# Altium PCB linkit-v4-0.1_6layers.PcbDoc (part 1 of 4)
Units mm, origin at the board's own origin, x right, y up, seen from the top; angles counter-clockwise.
Board outline 70 x 35 mm, 6 copper layers (Top Layer, Int1 (GND), Int2 (Sign), Int3 (Sign), Int4 (PWR), Bottom Layer), stack 1.551 mm thick; 190 components, 157 nets, 771 pads, 177 vias.
Unrouted connection lines stored in the file: 245.
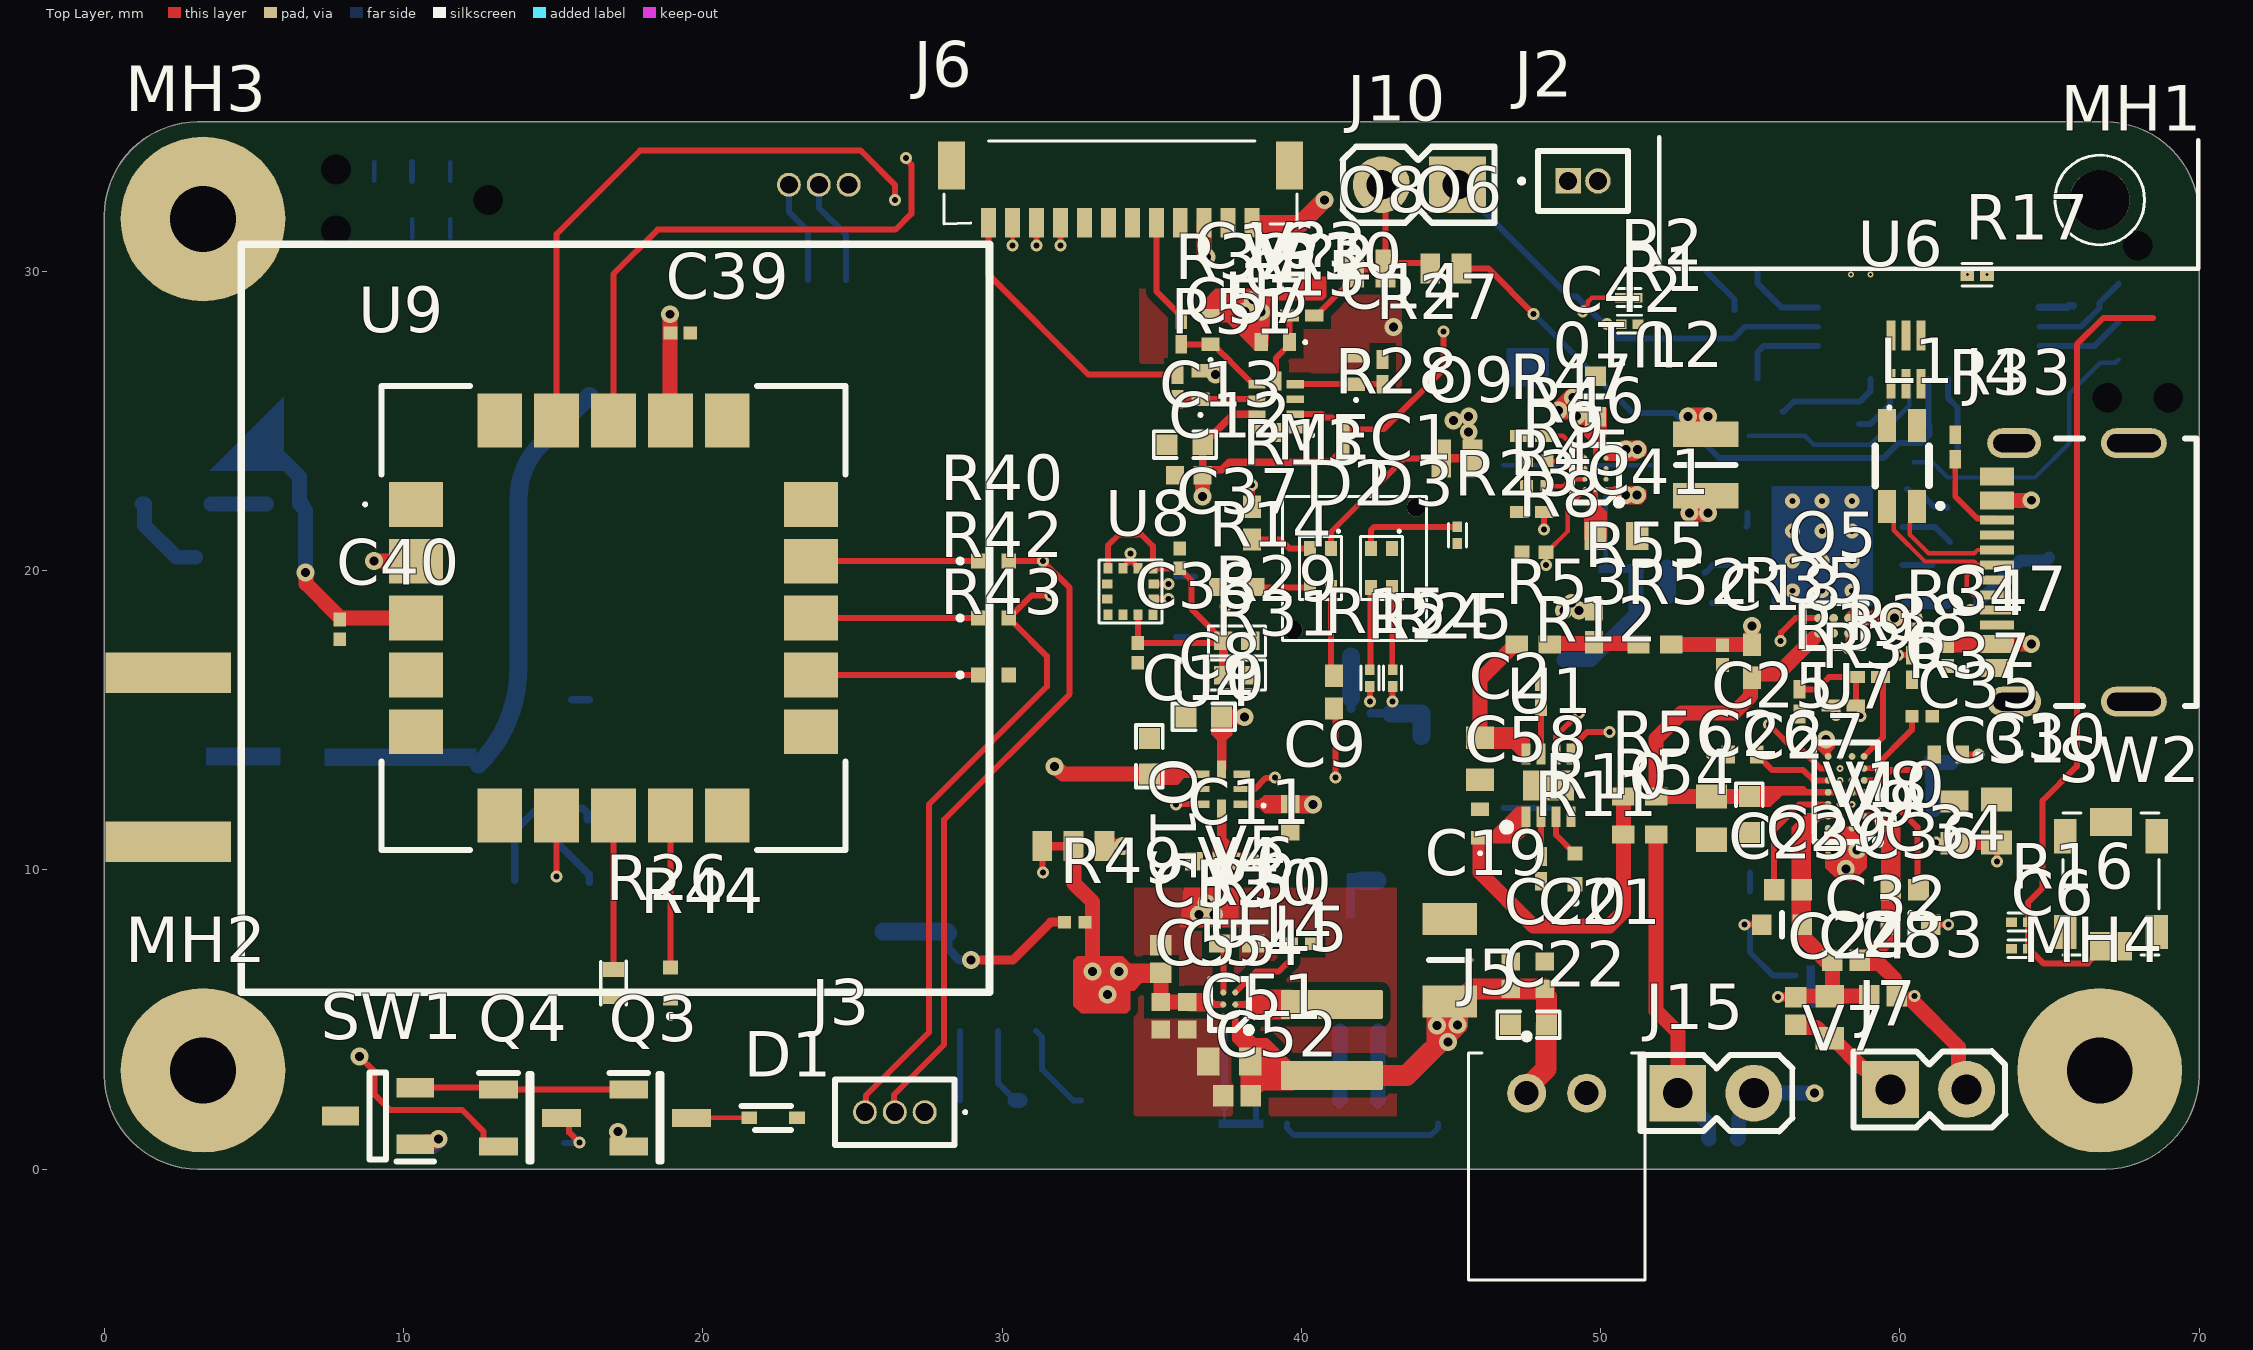
[diagram p0: Top Layer view]
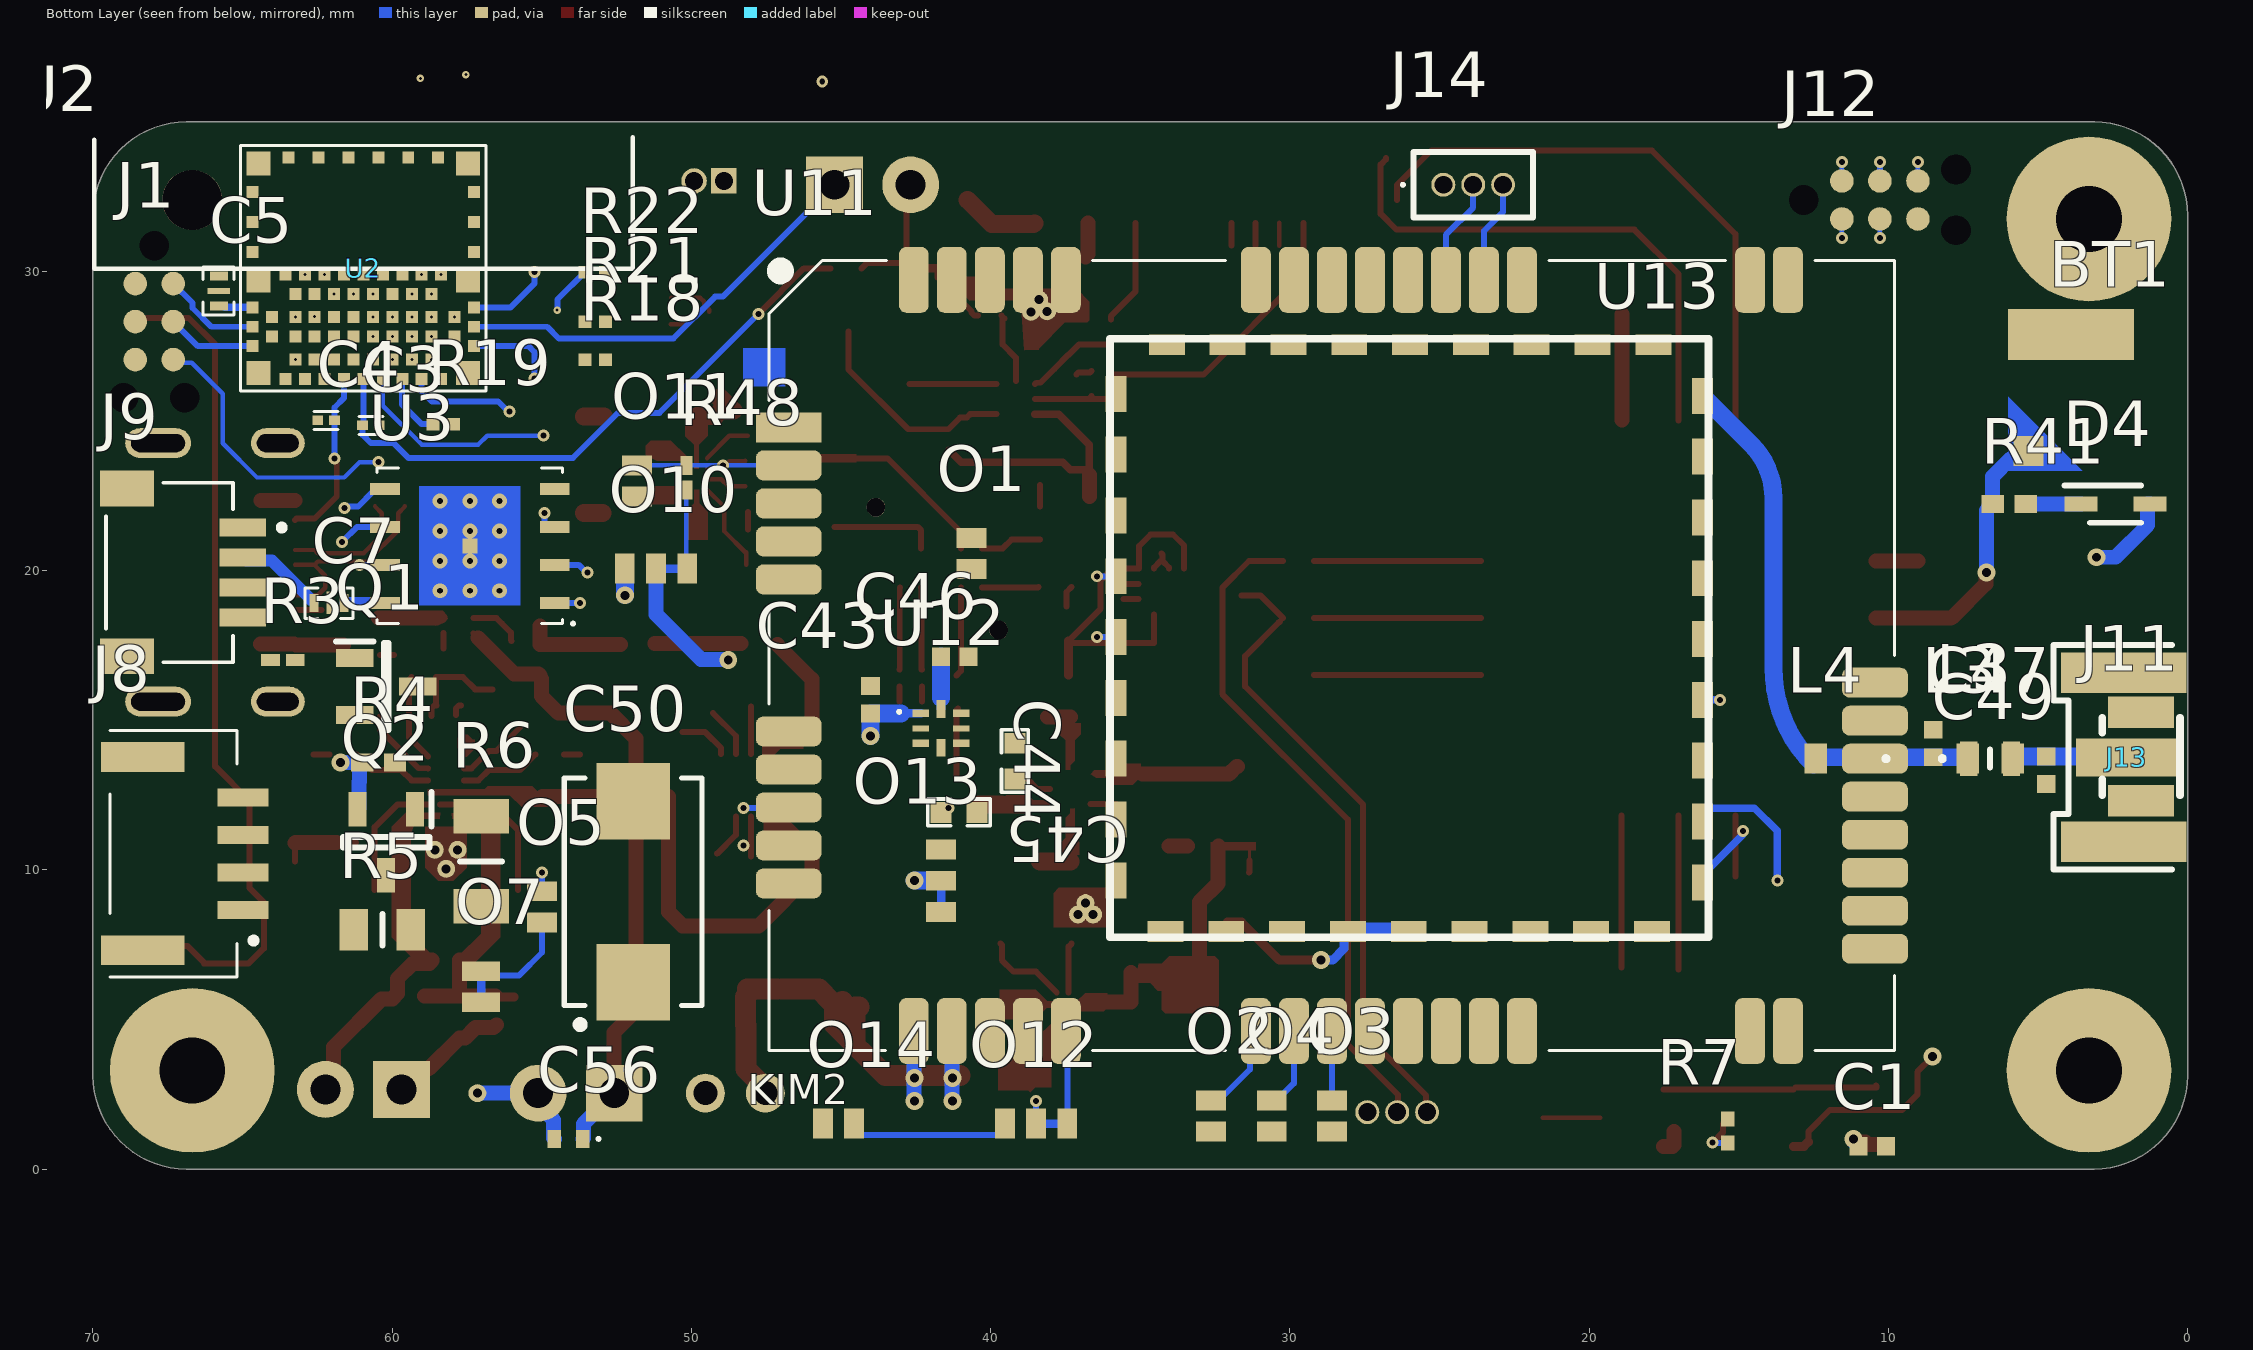
[diagram p1: Bottom Layer view, seen from below]
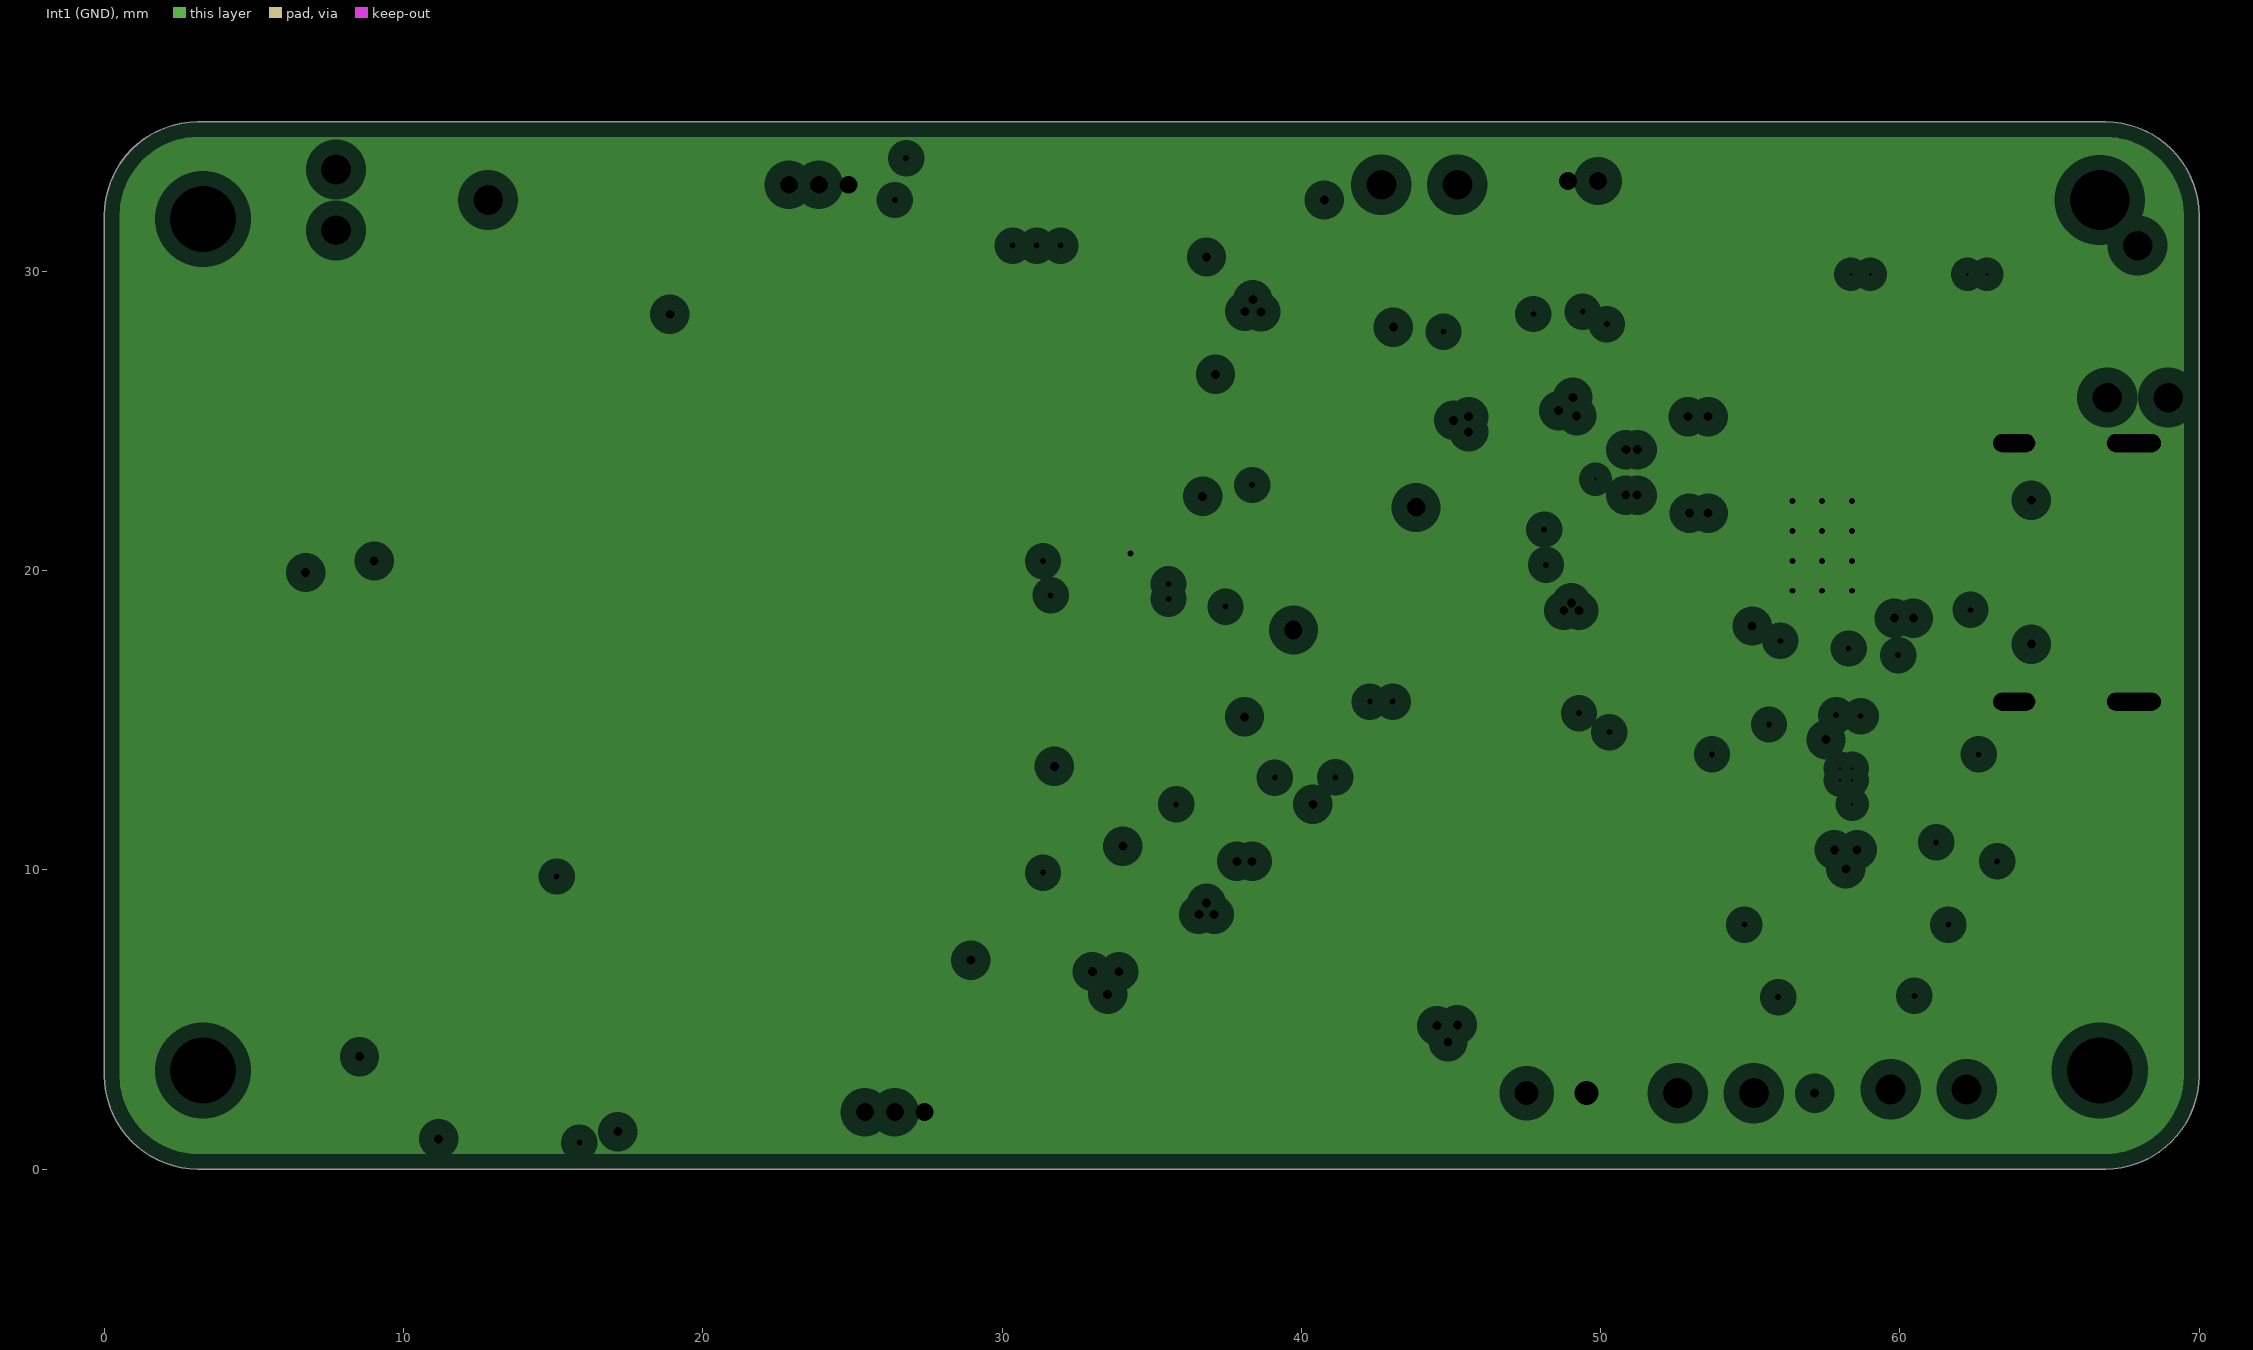
[diagram p2: Int1 (GND), clearances drawn from the general rule]
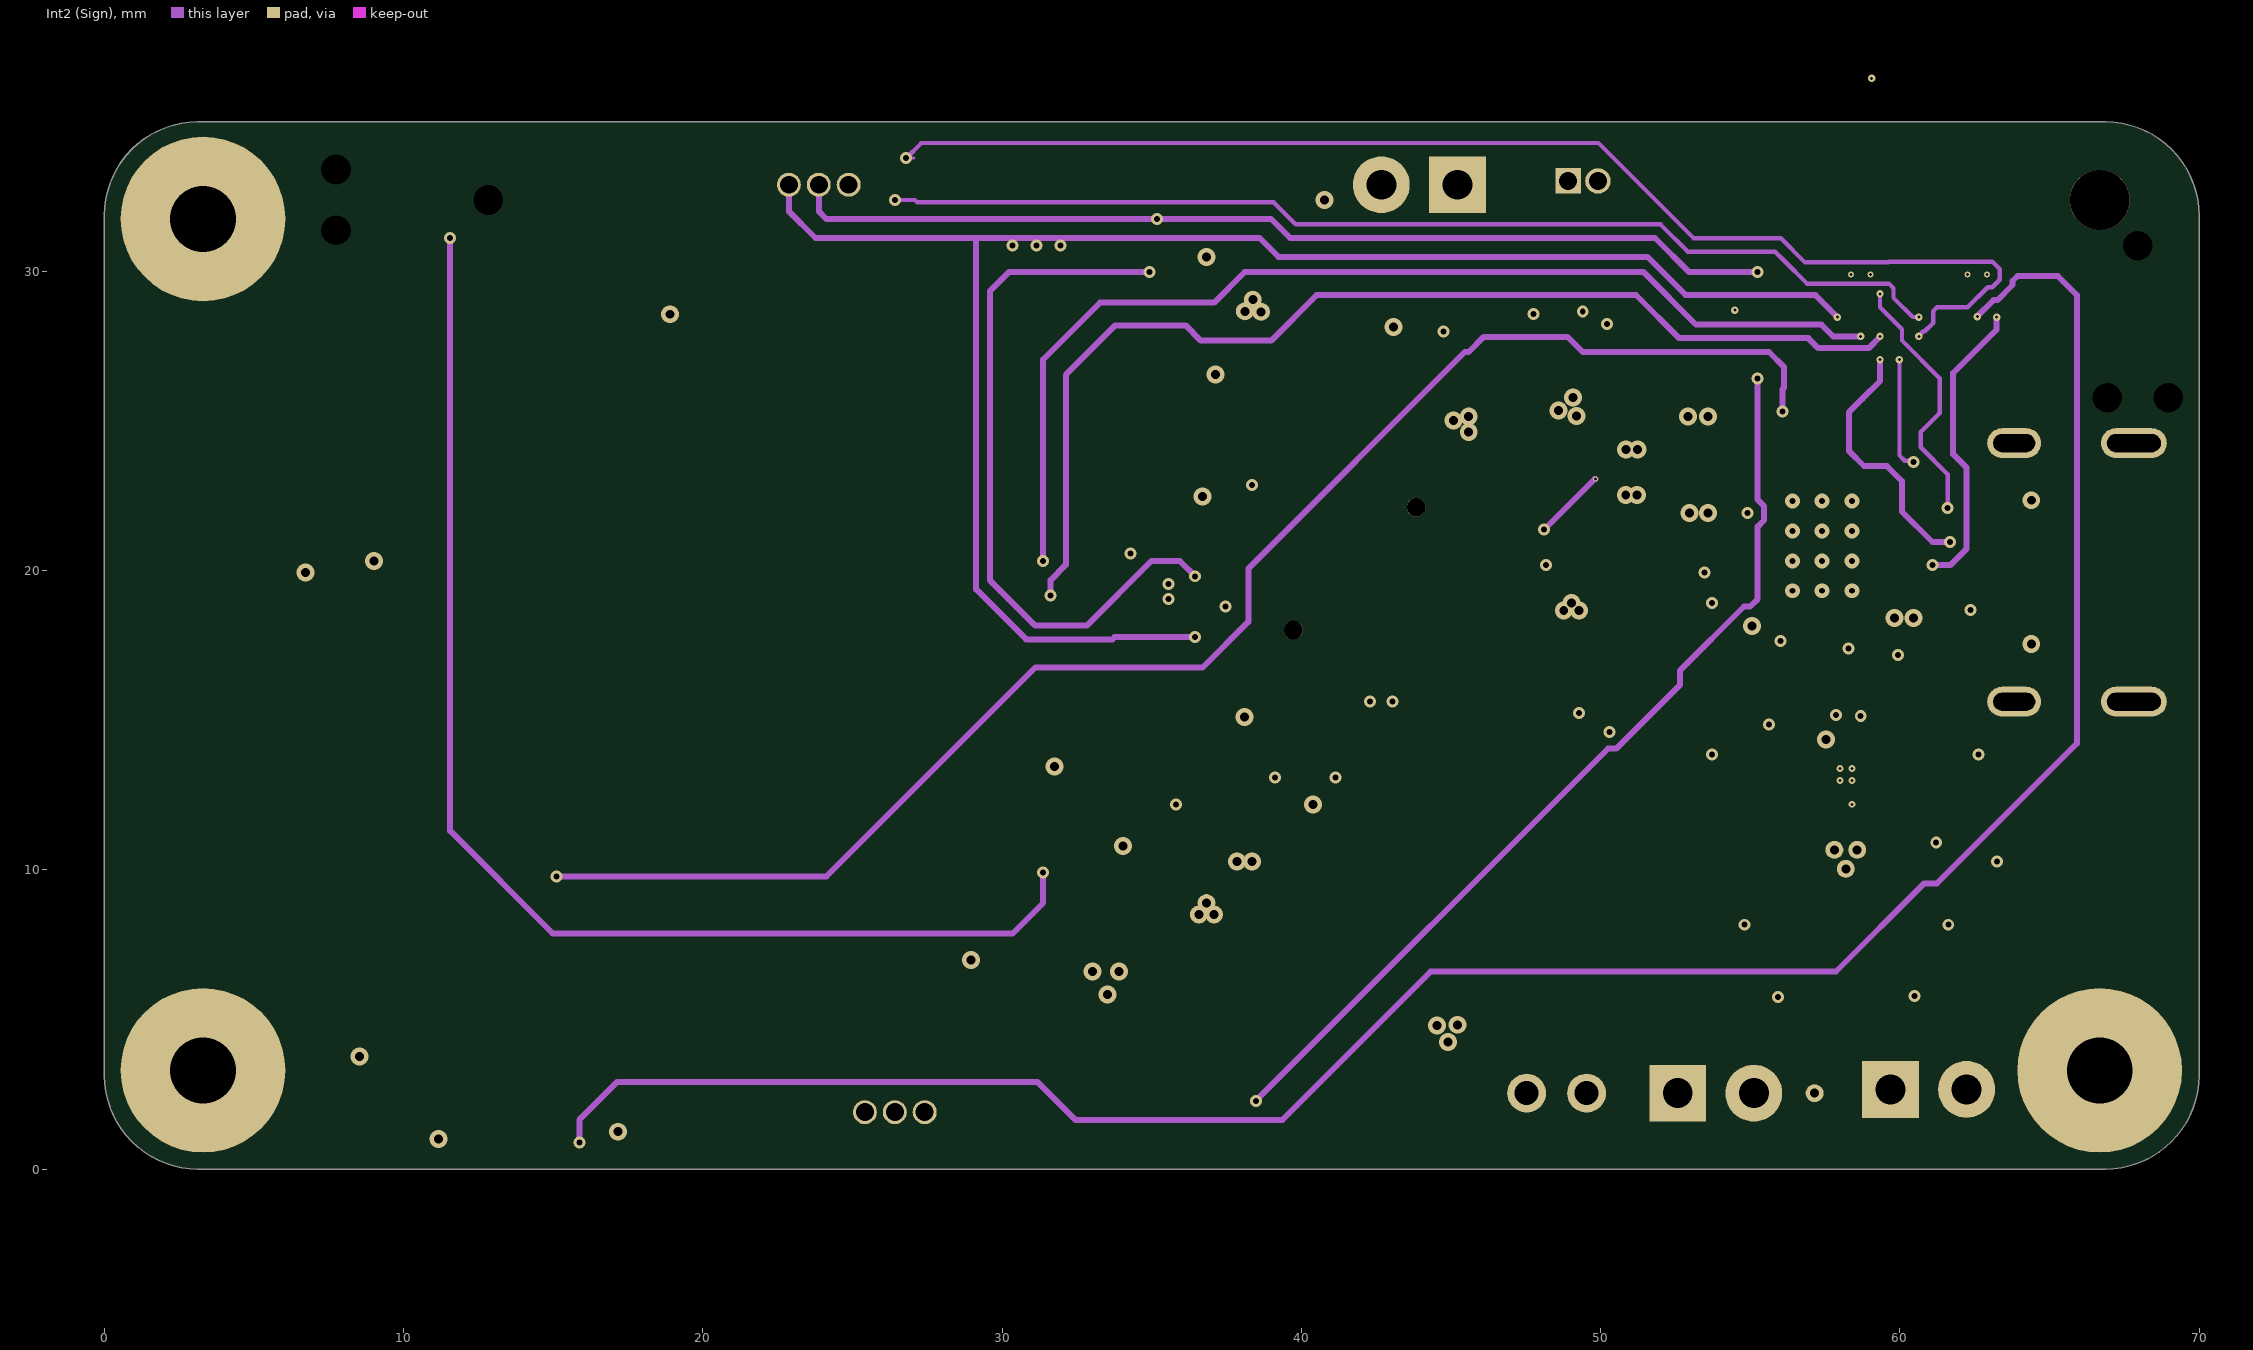
[diagram p3: Int2 (Sign)]
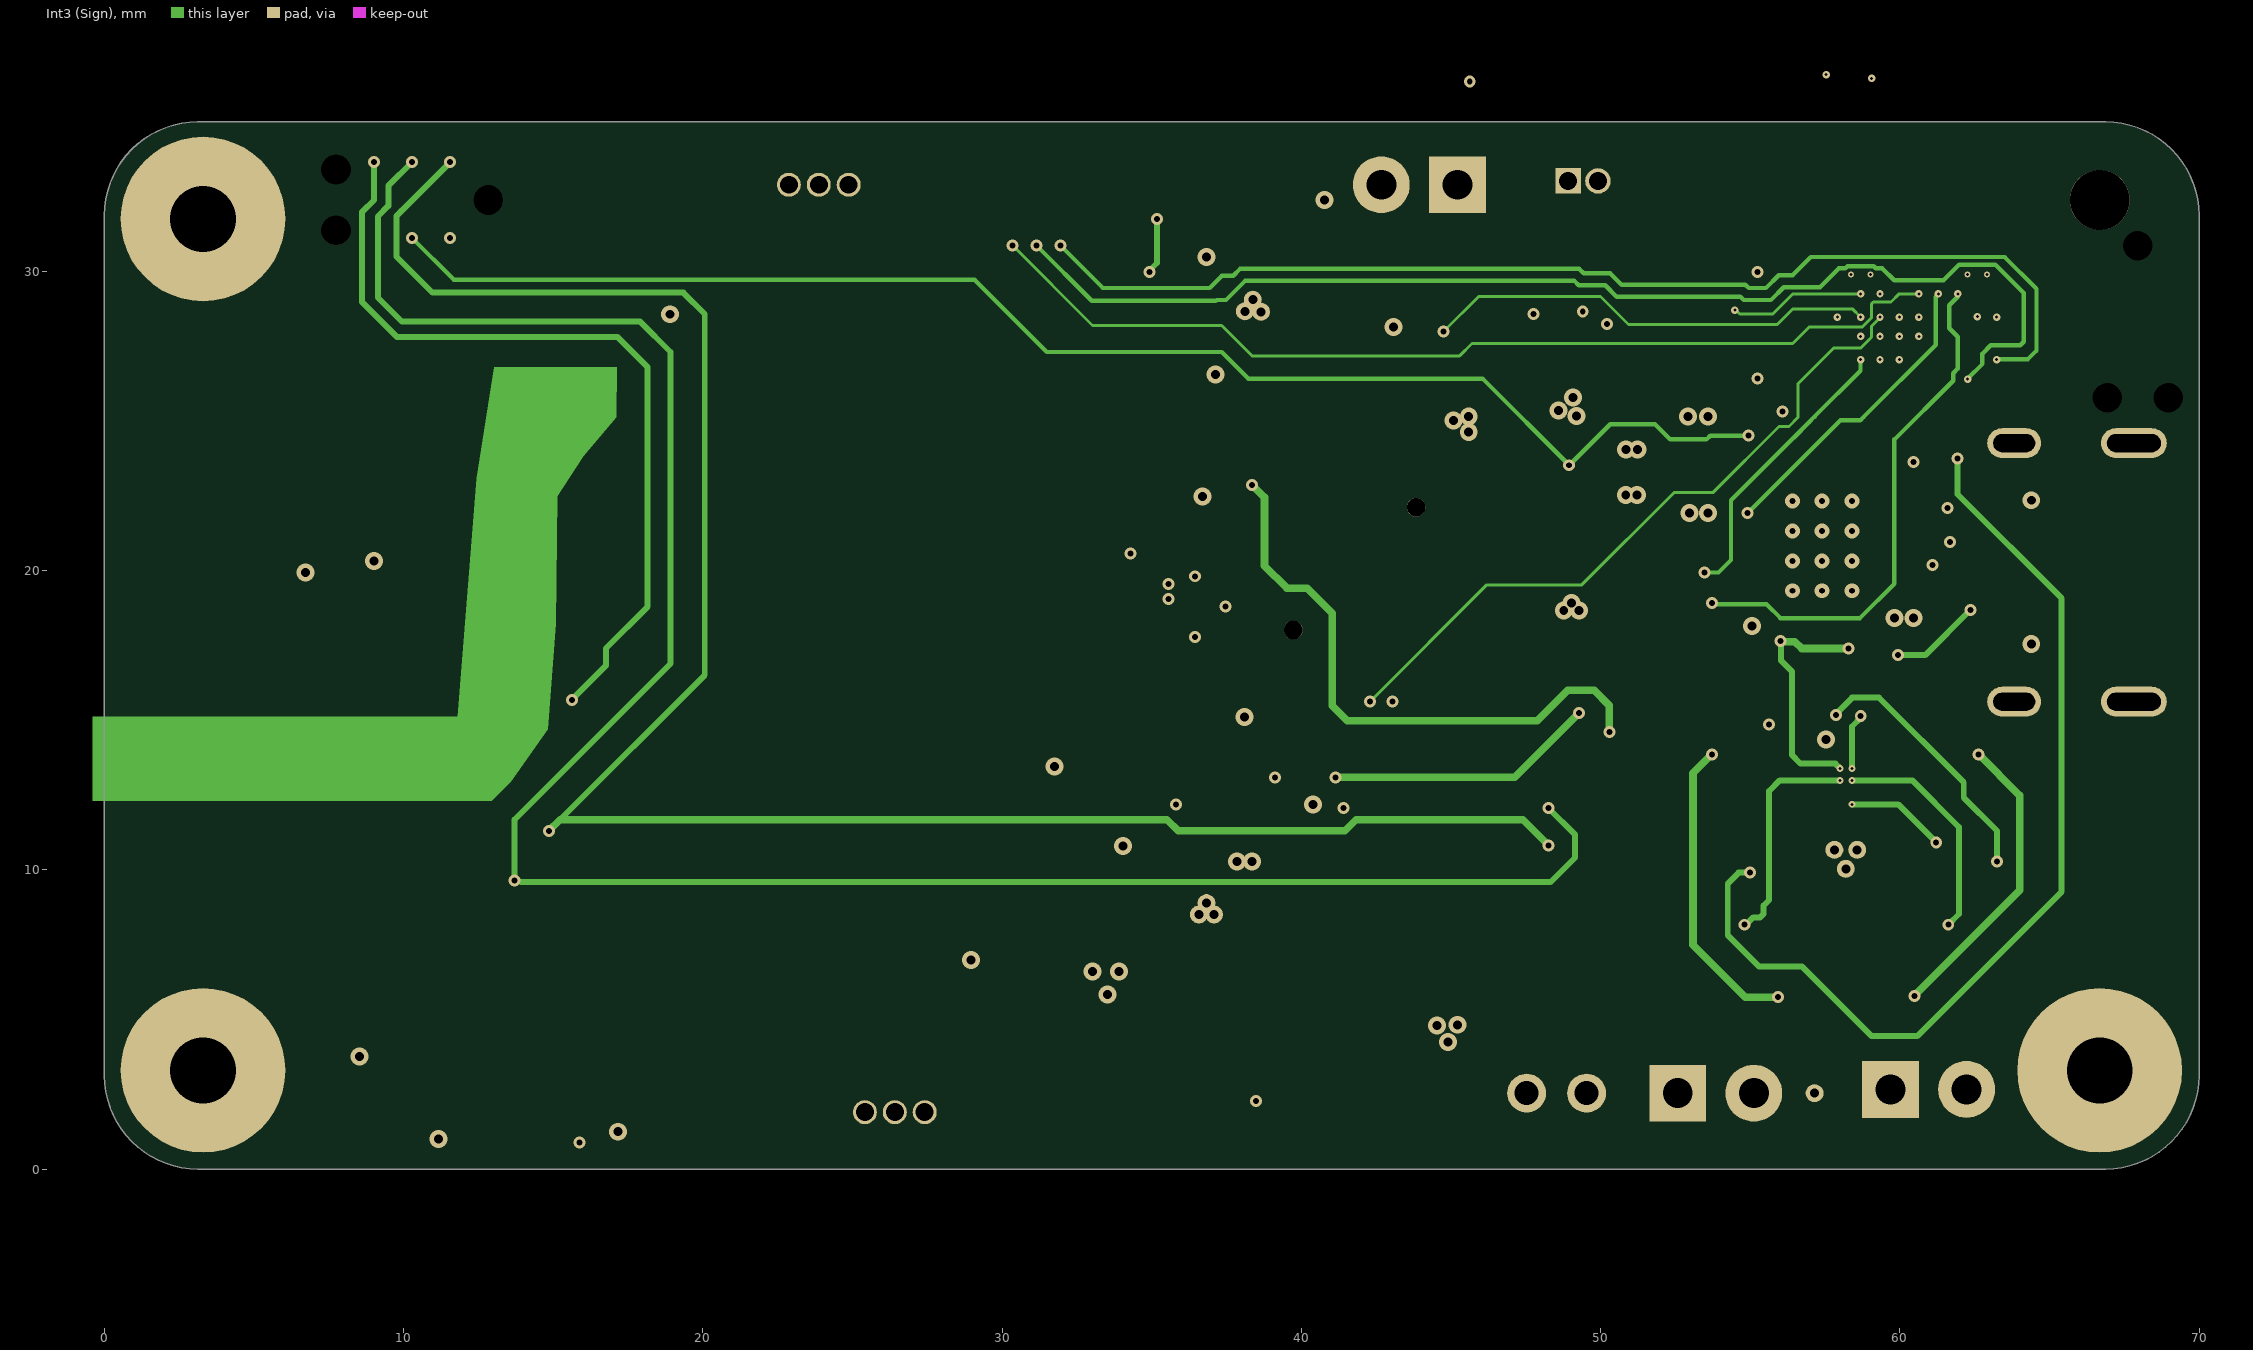
[diagram p4: Int3 (Sign)]
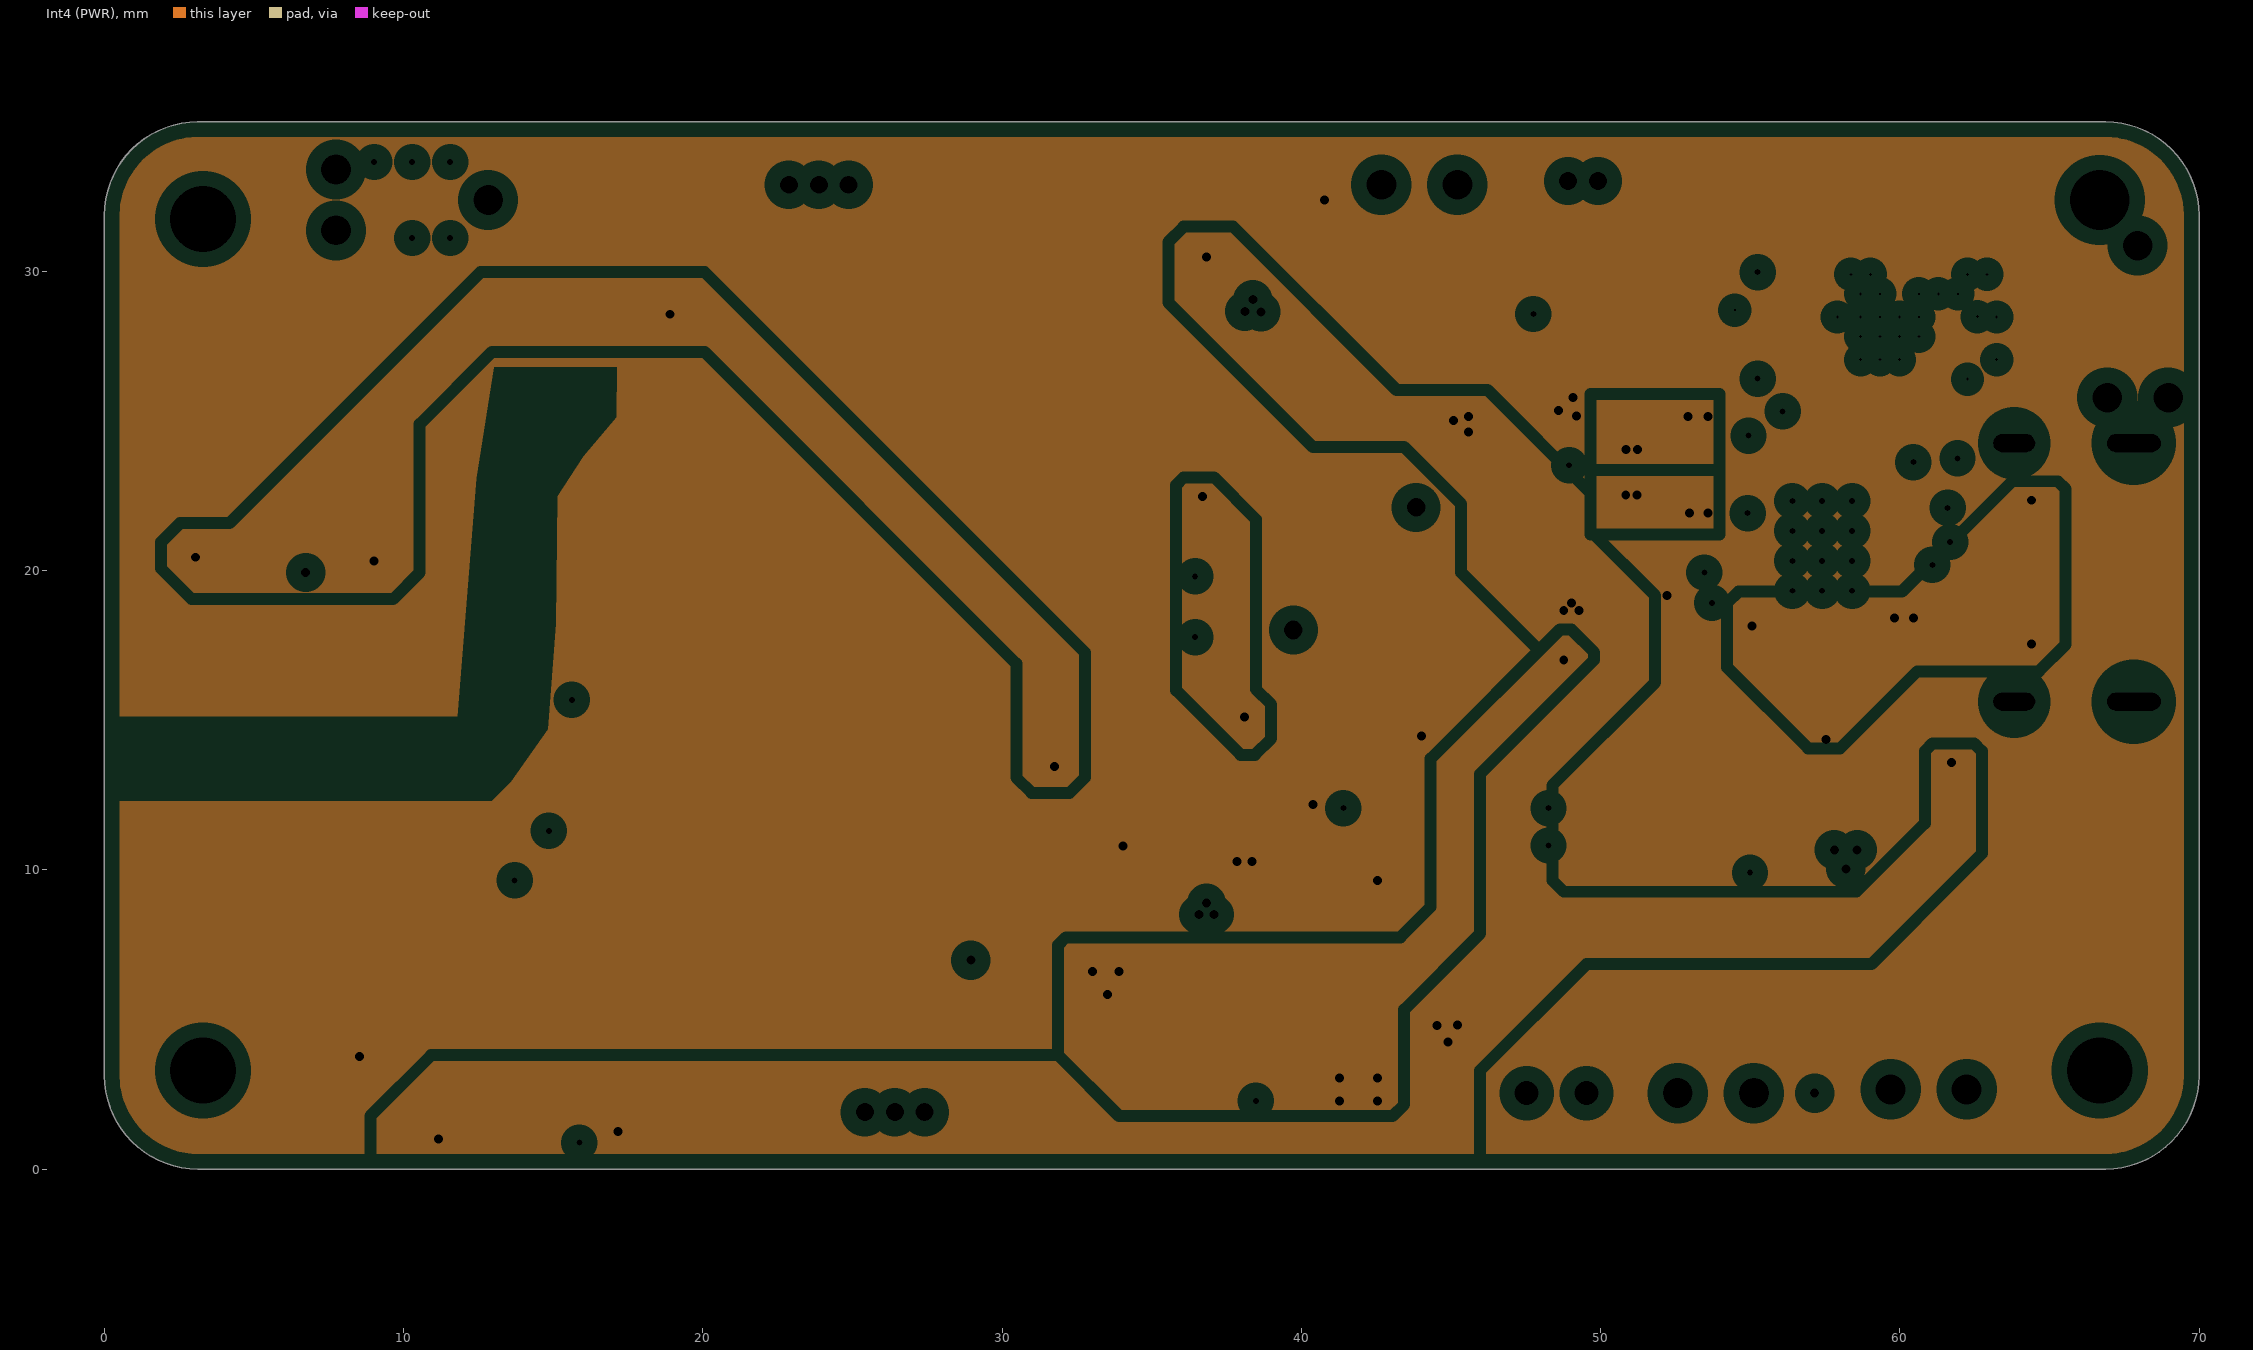
[diagram p5: Int4 (PWR), clearances drawn from the general rule]

## Layer stack, top to bottom
Top Solder: solder mask 0.0254, SM-001, Dk 4
Top Layer: signal copper 0.035
Dielectric 1: prepreg 0.0711, PP-006, Dk 4.1
Dielectric 2: prepreg 0.0711, PP-006, Dk 4.1
Int1 (GND): plane copper 0.035, net GND
Dielectric 3: core 0.4572, Core-035, Dk 4.7
Int2 (Sign): signal copper 0.035
Dielectric 4: prepreg 0.0711, PP-006, Dk 4.1
Dielectric 5: prepreg 0.0711, PP-006, Dk 4.1
Int3 (Sign): signal copper 0.035
Dielectric 6: core 0.4572, Core-035, Dk 4.7
Int4 (PWR): plane copper 0.035, net (Multiple Nets)
Dielectric 7: prepreg 0.0711, PP-006, Dk 4.1
Dielectric 8: prepreg 0.0711, PP-006, Dk 4.1
Bottom Layer: signal copper 0.035
Bottom Solder: solder mask 0.0254, SM-001, Dk 4

## Board outline
0,3.126 0,3.301 0,3.302 0,31.875 cw(c3.15,31.85) 3.125,35.001 3.125,35 66.875,35 66.875,35.001 cw(c66.85,31.85) 70,31.875 70,3.125 cw(c66.85,3.15) 66.875,0 3.125,0 cw(c3.15,3.151)

## Design rules (kind name [scope] priority, off if disabled: settings)
Clearance BGA_clearance [WithinRoom('ISP1807')] p1: gap=0.1 ignorepadtopadclearanceinfootprint=FALSE
Clearance GND_PGND2_Clearance [InNet('PGND2') vs InNet('PGND2')] p2: gap=0 ignorepadtopadclearanceinfootprint=FALSE
Clearance GND_PGND1_Clearance [InNet('PGND1') vs InNet('PGND1')] p3: gap=0 ignorepadtopadclearanceinfootprint=FALSE
Clearance [All] p4: gap=0.254 ignorepadtopadclearanceinfootprint=FALSE
ComponentClearance ComponentClearance_1 [InNet('GND') vs InNet('PGND1')] p1: gap=0 collisioncheckmode=3 verticalgap=0.254 showdistances=FALSE
ComponentClearance [All] p2: gap=0.254 collisioncheckmode=3 verticalgap=0.254 showdistances=FALSE
DiffPairsRouting [All] p1: maxlimit=0.127 minlimit=0.127 mostfreqgap=0.127 toplayer_minwidth=0.146 toplayer_maxwidth=0.146 toplayer_prefwidth=0.146 midlayer1_minwidth=0.08 midlayer1_maxwidth=0.08 midlayer1_prefwidth=0.08 midlayer2_minwidth=0.08 midlayer2_maxwidth=0.08 midlayer2_prefwidth=0.08 bottomlayer_minwidth=0.146 bottomlayer_maxwidth=0.146 bottomlayer_prefwidth=0.146 impedanceprofiledriven=TRUE impedanceprofileid={9859EE02-7A4D-4AE4-9C0F-A4F87AE66AFC} impedanceprofilevalue=90.000000 maxuncoupledlength=12.7
HoleSize [All] p1: absolutevalues=TRUE maxlimit=2.54 minlimit=0.1 maxpercent=80.000 minpercent=20.000
HoleToHoleClearance HoleToHoleClearance_1 [InNet('GND') vs InNet('PGND1')] p1: gap=0 allowstackedmicrovias=TRUE
HoleToHoleClearance [All] p2: gap=0.254 allowstackedmicrovias=TRUE
MaxMinImpedance "Schematic Impedance Constraint" [InNet('SAT_ANTENNA')] p1: minimum=48.00 maximum=52.00
PlaneClearance [All] p1: clearance=0.508
PlaneConnect PlaneConnect_PWR [InNetClass('Power')] p1: pad.planeconnectstyle=Relief pad.reliefexpansion=0.508 pad.reliefentries=4 pad.reliefconductorwidth=0.254 pad.reliefairgap=0.254 via.planeconnectstyle=Direct via.reliefexpansion=0.508 via.reliefentries=4 via.reliefconductorwidth=0.254 via.reliefairgap=0.254
PlaneConnect PlaneConnect_2 [InNet('GND')] p2: planeconnectstyle=Relief reliefexpansion=0.508 reliefentries=4 reliefconductorwidth=0.254 reliefairgap=0.254
PlaneConnect PlaneConnect_1 [InNet('PGND1')] p3: planeconnectstyle=Relief reliefexpansion=0.508 reliefentries=4 reliefconductorwidth=0.254 reliefairgap=0.254
PlaneConnect [All] p4: planeconnectstyle=Direct reliefexpansion=0.508 reliefentries=4 reliefconductorwidth=0.254 reliefairgap=0.254
PolygonConnect PolygonConnect_1 [InNet('GND') vs InNet('PGND2')] p1: connectstyle=Direct reliefconductorwidth=0.254 reliefentries=4 polygonreliefangle="90 Angle" airgapwidth=0.254
PolygonConnect DirectGND_VIas [InNet('GND') vs InNet('PGND1')] p2: connectstyle=Direct reliefconductorwidth=0.254 reliefentries=4 polygonreliefangle="90 Angle" airgapwidth=0.254
PolygonConnect [All] p3: connectstyle=Direct reliefconductorwidth=0.254 reliefentries=4 polygonreliefangle="90 Angle" airgapwidth=0.254
RoomDefinition SMD [InComponentClass('SMD')] p1: confinementstyle=ConfineIn formatcopy=TRUE lockcomponents=FALSE outline 2.465,1.405 42.47,1.405 42.47,36.076 2.465,36.076
RoomDefinition ISP1807 [False vs False] p2: confinementstyle=ConfineIn formatcopy=TRUE lockcomponents=FALSE outline 56.134,25.146 69.723,25.146 69.723,35.814 56.134,35.814
RoomDefinition KIM2 [InComponentClass('KIM2')] p3: confinementstyle=ConfineIn formatcopy=TRUE lockcomponents=FALSE outline 0.889,-0.372 47.985,-0.372 47.985,35.569 0.889,35.569
RoomDefinition Sensors [InComponentClass('Sensors')] p4: confinementstyle=ConfineIn formatcopy=TRUE lockcomponents=FALSE outline 123.063,-11.557 173.863,-11.557 173.863,13.843 123.063,13.843
RoomDefinition Power [InComponentClass('Power')] p5: confinementstyle=ConfineIn formatcopy=TRUE lockcomponents=FALSE outline 65.151,106.426 133.096,106.426 133.096,113.03 65.151,113.03
RoutingVias [All] p1: holewidth=0.711 width=1.27 viastyle="Through Hole" minholewidth=0.711 minwidth=1.27 maxholewidth=0.711 maxwidth=1.27
ShortCircuit GND_PGND1 [InNet('GND') vs InNet('PGND1')] p1: allowed=TRUE
ShortCircuit [All] p2: allowed=FALSE
SolderMaskExpansion [All] p1: expansion=0.102 istentingtop=FALSE
SupplyNets "Schematic Supply Nets_13" [InNet('PGND3')] p1: voltage=0.000
SupplyNets "Schematic Supply Nets_12" [InNet('AGND')] p2: voltage=0.000
SupplyNets "Schematic Supply Nets_11" [InNet('PGND1')] p3: voltage=0.000
SupplyNets "Schematic Supply Nets_10" [InNet('VSAT')] p4: voltage=0.000
SupplyNets "Schematic Supply Nets_9" [InNet('GND')] p5: voltage=0.000
SupplyNets "Schematic Supply Nets_8" [InNet('VSENS_2')] p6: voltage=0.000
SupplyNets "Schematic Supply Nets_7" [InNet('VBUS')] p7: voltage=0.000
SupplyNets "Schematic Supply Nets_6" [InNet('PGND2')] p8: voltage=0.000
SupplyNets "Schematic Supply Nets_5" [InNet('DCDC_3V3')] p9: voltage=0.000
SupplyNets "Schematic Supply Nets_4" [InNet('VSYS_SMD')] p10: voltage=0.000
SupplyNets "Schematic Supply Nets_3" [InNet('VSENS_1')] p11: voltage=0.000
SupplyNets "Schematic Supply Nets_2" [InNet('VSYS_VPA')] p12: voltage=0.000
SupplyNets "Schematic Supply Nets_1" [InNet('VSYS')] p13: voltage=0.000
SupplyNets "Schematic Supply Nets" [InNet('VBAT')] p14: voltage=0.000
Width "Schematic Width Constraint_3" [InNet('NetC2_2')] p1: maxlimit=1 minlimit=0.254 preferedwidth=0.5 toplayer_minwidth=0.4 midlayer1_maxwidth=0.254 midlayer1_prefwidth=0.254 midlayer2_maxwidth=0.254 midlayer2_prefwidth=0.254 bottomlayer_minwidth=0.4 minimp=50.000000 maximp=50.000000 favimp=50.000000
Width "Schematic Width Constraint_4" [InNet('SPV-')] p2: maxlimit=1 minlimit=0.254 preferedwidth=0.5 toplayer_minwidth=0.4 midlayer1_maxwidth=0.254 midlayer1_prefwidth=0.254 midlayer2_maxwidth=0.254 midlayer2_prefwidth=0.254 bottomlayer_minwidth=0.4 minimp=50.000000 maximp=50.000000 favimp=50.000000
Width "Schematic Width Constraint_5" [InNet('SPV+')] p3: maxlimit=1 minlimit=0.254 preferedwidth=0.5 toplayer_minwidth=0.4 midlayer1_maxwidth=0.254 midlayer1_prefwidth=0.254 midlayer2_maxwidth=0.254 midlayer2_prefwidth=0.254 bottomlayer_minwidth=0.4 minimp=50.000000 maximp=50.000000 favimp=50.000000
Width "Schematic Width Constraint_2" [InNet('NetC58_1')] p4: maxlimit=1 minlimit=0.254 preferedwidth=0.5 toplayer_minwidth=0.4 midlayer1_maxwidth=0.254 midlayer1_prefwidth=0.254 midlayer2_maxwidth=0.254 midlayer2_prefwidth=0.254 bottomlayer_minwidth=0.4 minimp=50.000000 maximp=50.000000 favimp=50.000000
Width "Schematic Width Constraint_1" [InNet('VBUS')] p5: maxlimit=1 minlimit=0.254 preferedwidth=0.5 toplayer_minwidth=0.4 midlayer1_maxwidth=0.254 midlayer1_prefwidth=0.254 midlayer2_maxwidth=0.254 midlayer2_prefwidth=0.254 bottomlayer_minwidth=0.4 minimp=50.000000 maximp=50.000000 favimp=50.000000
Width "Schematic Width Constraint_6" [InNet('VBAT')] p6: maxlimit=1 minlimit=0.254 preferedwidth=0.5 toplayer_minwidth=0.4 midlayer1_maxwidth=0.254 midlayer1_prefwidth=0.254 midlayer2_maxwidth=0.254 midlayer2_prefwidth=0.254 bottomlayer_minwidth=0.4 minimp=50.000000 maximp=50.000000 favimp=50.000000
Width "Schematic Width Constraint_7" [InNet('RX-OUT')] p7: maxlimit=1 minlimit=0.254 preferedwidth=0.5 toplayer_minwidth=0.4 midlayer1_maxwidth=0.254 midlayer1_prefwidth=0.254 midlayer2_maxwidth=0.254 midlayer2_prefwidth=0.254 bottomlayer_minwidth=0.4 minimp=50.000000 maximp=50.000000 favimp=50.000000
Width "Schematic Width Constraint" [InNet('NetC5_2')] p8: maxlimit=0.254 minlimit=0.254 preferedwidth=0.254
Width "Schematic Width Constraint_8" [InNet('COIL-2')] p9: maxlimit=1 minlimit=0.254 preferedwidth=0.5 toplayer_minwidth=0.4 midlayer1_maxwidth=0.254 midlayer1_prefwidth=0.254 midlayer2_maxwidth=0.254 midlayer2_prefwidth=0.254 bottomlayer_minwidth=0.4 minimp=50.000000 maximp=50.000000 favimp=50.000000
Width [All] p10: maxlimit=1 minlimit=0.1 preferedwidth=0.2 minimp=50.000000 maximp=50.000000 favimp=50.000000
23 further rules are at their usual default settings.

## Classes and differential pairs
net class QSPI: QSPI_CLK QSPI_IO0 QSPI_IO1 QSPI_IO2 QSPI_IO3
differential pair class USB: USB USB_D USB_L
net class C33_Nets: COIL-2 NetC23_1
component class BGA_Comp: U2 U7
net class V10_Nets: GND PGND3
net class V9_Nets: GND PGND3
net class V8_Nets: GND PGND3
net class R56_Nets: NetC58_1 RX-OUT
net class R55_Nets: NetR52_1 VBAT
net class R54_Nets: NetC58_1 SPV+
net class R53_Nets: NetC2_2 NetR52_1
net class R52_Nets: NetR52_1 VBUS
net class MH4_Nets: NetMH4_1
net class MH3_Nets: NetMH3_1
net class MH2_Nets: NetMH2_1
net class V7_Nets: GND SPV-
net class R51_Nets: ADC3 NetC57_1
net class J15_Nets: SPV+ SPV-
net class J14_Nets: GND SAT_UART_RX SAT_UART_TX
net class C58_Nets: GND NetC58_1
net class C57_Nets: AGND NetC57_1
net class V?3_Nets: AGND GND
net class V?2_Nets: AGND GND
net class V?1_Nets: AGND GND
net class C56_Nets: SPV+ SPV-
net class R50_Nets: NetR50_1 PGND2
net class O10_Nets: NetO10_1 VSAT VSYS
net class V6_Nets: GND PGND2
net class V5_Nets: GND PGND2
net class V4_Nets: GND PGND2
net class V3_Nets: GND PGND1
net class V2_Nets: GND PGND1
net class V1_Nets: GND PGND1
net class U14_Nets: NetL5_2 NetR50_1 PGND2 SAT_EN VBAT VSAT
net class U13_Nets: GND KIM_TX NetO13_1 NetU13_11 NetU13_12 nRESET-SAT SAT_INT SAT_SPI_MISO SAT_SPI_NSS SAT_SPI_SCK SAT_SWCLK SAT_SWDIO SAT_SWO SAT_UART_RX SAT_UART_TX SAT_WKUP SMD_ANT SMD_RF_BUSY SMD_RF_NRST SMD_SCL SMD_SDA SMD_VPA_GOOD VPA_EN VSYS_SMD VSYS_VPA
net class U12_Nets: GND SAT_EN VPA_EN VSYS VSYS_SMD VSYS_VPA
net class U11_Nets: GND KIM_I2C_SCL KIM_I2C_SDA KIM_RX KIM_TX NetO12_1 NetU11_20 NetU11_22 NetU11_23 NetU11_25 NetU11_27 NetU11_28 NetU11_44 NetU11_46 NetU11_48 nRESET-SAT SAT_ANTENNA SAT_INT SAT_SPI_MISO SAT_SPI_NSS SAT_SPI_SCK SAT_SWCLK SAT_SWDIO SAT_UART_RX SAT_UART_TX SAT_WKUP VSAT
net class U10_Nets: LX1 LX2 NetR45_1 NetR46_1 NetR47_2 PGND1 VBAT VCC_SEL VSYS VSYS_EN
net class U9_Nets: GND GPS_INT GPS_NRST GPS_PPS NetBT1_+ NetR40_1 NetR42_1 NetR43_1 NetR44_2 SAFE VSENS_2
net class U8_Nets: BMA_PWR GND I2C_SCL I2C_SDA INT1_IMU INT2_IMU NetU8_4 NetU8_11
net class U7_Nets: BOOT1 BOOT2 CLAMP1 CLAMP2 COIL-2 COMM1 COMM2 GND NetC23_1 NetC30_1 NetQ5_A2 NetR36_2 NetR37_1 NetR38_2 PGND3 RX-OUT VBUS WIRELESS_NCHG_LED
net class U6_Nets: GND USB_D_N USB_D_P USB_L_N USB_L_P VBUS
net class U5_Nets: ADC_ALERT_RDY GND I2C_SCL I2C_SDA NetC14_1 NetC15_1 NetC16_1 NetC57_1 NetU5_7 VSENS_1
net class U4_Nets: GND GPS_PWR_EN VADC_EN VSENS_1 VSENS_2 VSYS
net class U3_Nets: GND NetC7_2 QSPI_CLK QSPI_CS QSPI_IO0 QSPI_IO1 QSPI_IO2 QSPI_IO3
net class U2_Nets: ADC_ALERT_RDY BAT_AN BAT_READ_EN GND GPIO GPS_INT GPS_NRST GPS_PPS GPS_PWR_EN GPS_UART_RX GPS_UART_TX I2C_SCL I2C_SDA IMU_PWR INT1_IMU INT2_IMU KIM_PWR_ON LED_B LED_G LED_R NetC5_2 NetR17_1 NetR17_2 NetU2_48 NetU2_59 NetU2_65 NetU2_66 NetU2_67 NetU2_68 NetU2_69 NetU2_70 NetU2_71 NetU2_72 NetU2_73 NetU2_74 NetU2_75 NetU2_76 NetU2_77 NetU2_78 nRESET nRESET-SAT NRF_DBG POWER_CONTROL QSPI_CLK QSPI_CS QSPI_IO0 QSPI_IO1 QSPI_IO2 QSPI_IO3 REED_MCU SAT_EN SAT_INT SAT_UART_RX SAT_UART_TX SAT_WKUP SLOW_SWS_SEND SPI_CLK SPI_MISO SPI_MOSI SPI_NSS STAT_LED SWDCLK SWDIO SWS USB_D_N USB_D_P VADC_EN VBUS VCC_SEL
net class U1_Nets: GND NetC2_2 NetC58_1 NetR10_2 NetR11_2 NetR12_2 NPG_LED STAT_LED
net class SW2_Nets: GND nRESET
net class SW1_Nets: GND NetQ3_1 VBAT
net class SMD_Nets: NetO13_1 NetU13_11 NetU13_12 VPA_EN VSYS_VPA
net class Sensors_Nets: ADC0 ADC1 ADC2 ADC3 ADC_ALERT_RDY AGND BMA_PWR DCDC_3V3 GND GPS_INT GPS_NRST GPS_PPS GPS_PWR_EN GPS_UART_RX GPS_UART_TX I2C_SCL I2C_SDA IMU_PWR INT1_IMU INT2_IMU NetC14_1 NetC15_1 NetC16_1 NetC57_1 NetU5_7 SAFE VADC_EN VSENS_1 VSENS_2 VSYS
net class Satellite_Nets: NetC49_2 NetJ12_1 NetL2_1 NetL2_2 NetL3_1 NetL3_2
net class R49_Nets: VSAT VSYS_SMD
net class R48_Nets: NetO10_1 nRESET-SAT
net class R47_Nets: NetR47_2 PGND1
net class R46_Nets: NetR46_1 PGND1
net class R45_Nets: NetR45_1 PGND1
net class R44_Nets: I2C_SDA NetR44_2
net class R43_Nets: I2C_SCL NetR43_1
net class R42_Nets: GPS_UART_TX NetR42_1
net class R41_Nets: NetBT1_+ NetD4_1
net class R40_Nets: GPS_UART_RX NetR40_1
net class R39_Nets: GND NetR36_2
net class R38_Nets: NetR36_2 NetR38_2
net class R37_Nets: GND NetR37_1
net class R36_Nets: NetC30_1 NetR36_2
net class R35_Nets: RX-OUT VBUS
net class R34_Nets: GND NetJ4_A5
net class R33_Nets: GND NetJ4_B5
net class R32_Nets: ADC2 NetC16_1
net class R31_Nets: BMA_PWR IMU_PWR
net class R30_Nets: ADC1 NetC15_1
net class R29_Nets: BMA_PWR DCDC_3V3
net class R27_Nets: ADC0 NetC14_1
net class R26_Nets: GND SAFE
net class R25_Nets: LED_G NetD3_4
net class R24_Nets: LED_B NetD3_3
net class R23_Nets: LED_R NetD3_2
net class R22_Nets: BAT_READ_EN GND
net class R21_Nets: GND GPS_PWR_EN
net class R28_Nets: ADC_ALERT_RDY VSENS_1
net class R20_Nets: GND SAT_EN
net class R19_Nets: GND SAT_WKUP
net class R18_Nets: GND IMU_PWR
net class R17_Nets: NetR17_1 NetR17_2
net class R16_Nets: nRESET VSYS
net class R15_Nets: NetD2_4 NPG_LED
net class R14_Nets: NetD2_3 WIRELESS_NCHG_LED
net class R13_Nets: NetD2_2 STAT_LED
net class R12_Nets: GND NetR12_2
net class R11_Nets: GND NetR11_2
net class R10_Nets: GND NetR10_2
net class R9_Nets: VBAT VCC_SEL
net class R8_Nets: GND VSYS_EN
net class R7_Nets: GND REED_MCU
net class R6_Nets: GND VBAT_SENSE
net class R5_Nets: NetQ2_3 VBAT_SENSE
net class R4_Nets: NetQ1_3 VBAT
net class R3_Nets: BAT_READ_EN NetQ1_1
net class R2_Nets: I2C_SDA VSYS
net class R1_Nets: I2C_SCL VSYS
net class Q5_Nets: NetQ5_A2 NetQ5_B1 NetQ5_B2 RX-OUT VBUS
net class Q4_Nets: NetQ3_1 REED_MCU VSYS
net class Q3_Nets: NetQ3_1 VBAT VSYS_EN
net class Q2_Nets: NetQ1_3 NetQ2_3 VBAT
net class Q1_Nets: GND NetQ1_1 NetQ1_3
net class Power: COIL-2 NetC2_2 NetC23_1 NetC58_1 RX-OUT SPV+ SPV- VBAT VBUS VSYS_SMD VSYS_VPA
net class Power_Nets: COIL-1 COIL-2 GND NetC2_2 NetC58_1 NetD2_1 NetD2_2 NetD2_3 NetD2_4 NetQ3_1 NetR10_2 NetR11_2 NetR12_2 NetR52_1 NPG_LED PGND1 POWER_CONTROL REED_MCU RX-OUT SPV+ SPV- STAT_LED VBAT VBUS VCC_SEL VSYS VSYS_EN WIRELESS_NCHG_LED
net class O14_Nets: SAT_EN VSYS
net class O15_Nets: NetJ12_1 VSAT VSYS
net class O13_Nets: NetO13_1 VSYS VSYS_SMD
net class O12_Nets: KIM_PWR_ON NetO12_1 SAT_EN
net class O11_Nets: GND nRESET-SAT
net class O9_Nets: NetD2_1 VBAT
net class O8_Nets: ADC1 SWS_IN
net class O7_Nets: ADC0 VBAT_SENSE
net class O6_Nets: SWS SWS_IN
net class O5_Nets: BAT_AN VBAT_SENSE
net class O4_Nets: SAT_SPI_MISO SPI_MISO
net class O3_Nets: KIM_TX SPI_MOSI
net class O2_Nets: SAT_SPI_SCK SPI_CLK
net class O1_Nets: SAT_SPI_NSS SPI_NSS
net class L5_Nets: NetL5_2 VBAT
net class L4_Nets: NetL3_1 NetL3_2 SAT_ANTENNA SMD_ANT
net class L3_Nets: NetC49_2 NetL2_1 NetL2_2 SAT_ANTENNA
net class L2_Nets: LX1 LX2
net class L1_Nets: USB_L_N USB_L_P USB_N USB_P
net class KIM2_Nets: NetO10_1 NetO12_1 NetU11_20 NetU11_22 NetU11_23 NetU11_25 NetU11_27 NetU11_28 NetU11_44 NetU11_46 NetU11_48
net class J13_Nets: GND
net class J12_Nets: GND NetJ12_1 nRESET-SAT SAT_SWCLK SAT_SWDIO SAT_SWO
net class J11_Nets: GND NetC49_2
net class J10_Nets: SLOW_SWS_SEND SWS_IN
net class J9_Nets: GND I2C_SCL I2C_SDA VSYS
net class J8_Nets: GND I2C_SCL I2C_SDA VSYS
net class J7_Nets: COIL-1 COIL-2
net class J6_Nets: ADC2 ADC3 GND GPIO SPI_CLK SPI_MISO SPI_MOSI SPI_NSS VBAT VSYS
net class J5_Nets: GND VBAT
net class J4_Nets: GND NetJ4_A5 NetJ4_A8 NetJ4_B5 NetJ4_B8 USB_N USB_P VBUS
net class J3_Nets: GND GPS_UART_RX GPS_UART_TX
net class J2_Nets: GND NRF_DBG
net class J1_Nets: GND nRESET NRF_DBG SWDCLK SWDIO VSYS
net class ISP1807_Nets: LED_B LED_G LED_R NetC5_2 NetC7_2 NetD3_2 NetD3_3 NetD3_4 NetR17_1 NetR17_2 NetU2_48 NetU2_59 NetU2_65 NetU2_66 NetU2_67 NetU2_68 NetU2_69 NetU2_70 NetU2_71 NetU2_72 NetU2_73 NetU2_74 NetU2_75 NetU2_76 NetU2_77 NetU2_78 nRESET QSPI_CLK QSPI_CS QSPI_IO0 QSPI_IO1 QSPI_IO2 QSPI_IO3 SWDCLK SWDIO
net class Interface_Nets: NetJ4_A5 NetJ4_A8 NetJ4_B5 NetJ4_B8 USB_L_N USB_L_P USB_N USB_P
net class D4_Nets: NetD4_1 VSENS_2
net class D3_Nets: DCDC_3V3 NetD3_2 NetD3_3 NetD3_4
net class D2_Nets: NetD2_1 NetD2_2 NetD2_3 NetD2_4
net class D1_Nets: POWER_CONTROL VSYS_EN
net class C55_Nets: PGND2 VSAT
net class C54_Nets: PGND2 VSAT
net class C53_Nets: PGND2 VSAT
net class C52_Nets: PGND2 VBAT
net class C51_Nets: PGND2 VBAT
net class C50_Nets: PGND2 VBAT
net class C49_Nets: GND NetC49_2
net class C47_Nets: GND SAT_ANTENNA
net class C46_Nets: GND VSYS
net class C45_Nets: GND VSYS_VPA
net class C44_Nets: GND VSYS_SMD
net class C43_Nets: GND VSYS
net class C42_Nets: PGND1 VSYS
net class C41_Nets: PGND1 VBAT
net class C40_Nets: GND NetBT1_+
net class C39_Nets: GND VSENS_2
net class C38_Nets: BMA_PWR GND
net class C37_Nets: BMA_PWR GND
net class C36_Nets: CLAMP2 COIL-2
net class C35_Nets: COIL-2 COMM2
net class C34_Nets: BOOT2 COIL-2
net class C32_Nets: COIL-2 NetC23_1
net class C31_Nets: GND NetC30_1
net class C30_Nets: GND NetC30_1
net class C29_Nets: BOOT1 NetC23_1
net class C28_Nets: COIL-1 NetC23_1
net class C27_Nets: GND RX-OUT
net class C26_Nets: GND RX-OUT
net class C25_Nets: COMM1 NetC23_1
net class C24_Nets: COIL-1 NetC23_1
net class C23_Nets: CLAMP1 NetC23_1
net class C22_Nets: GND VBAT
net class C21_Nets: GND VBAT
net class C20_Nets: GND VBAT
net class C19_Nets: GND VBAT
net class C18_Nets: GND VBUS
net class C17_Nets: GND VBUS
net class C16_Nets: AGND NetC16_1
net class C15_Nets: AGND NetC15_1
net class C14_Nets: AGND NetC14_1
net class C13_Nets: GND VSENS_1
net class C12_Nets: GND VSENS_1
net class C11_Nets: GND VSYS
net class C10_Nets: GND VSENS_2
net class C9_Nets: GND VSYS
net class C8_Nets: GND VSENS_1
net class C7_Nets: GND NetC7_2 VSYS
net class C6_Nets: GND nRESET
net class C5_Nets: GND NetC5_2 VSYS
net class C4_Nets: BAT_AN GND
net class C3_Nets: GND SWS
net class C2_Nets: GND NetC2_2
net class C1_Nets: GND VBAT
net class BT1_Nets: GND NetBT1_+
net class 50R_track: I2C_SCL I2C_SDA QSPI_CLK QSPI_IO0 QSPI_IO1 QSPI_IO2 QSPI_IO3 SPI_CLK SPI_MISO SPI_MOSI SPI_NSS
component class U_TPS612997YBHR_3.6V: C50 C51 C52 C53 C54 C55 L5 R50 U14 V4 V5 V6
component class U_linkit-v4: O1 O2 O3 O4 O5 O6 O7 O8 Q1 Q2 R1 R2 R3 R4 R5 R6
component class "TPS63901 3V3&2V3": C41 C42 L2 R45 R46 R47 U10
component class SMD: C43 C44 C45 C46 O13 U12 U13
component class Sensors: C8 C9 C10 C11 C12 C13 C14 C15 C16 C57 R26 R27 R28 R29 R30 R31 R32 R51 U4 U5 V?1 V?2 V?3
component class Satellite: C47 C49 J11 J12 J13 L3 O14 O15 R49
component class SAM-M10Q: BT1 C39 C40 D4 R40 R41 R42 R43 R44 U9
component class Power: C1 C2 C56 C58 D1 D2 O9 Q3 Q4 R7 R8 R9 R10 R11 R12 R13 R14 R15 R52 R53 R54 R55 R56 SW1 U1 V7
component class KIM2: O10 O11 O12 R48 U11
component class ISP1807: C3 C4 C5 C6 C7 D3 J1 MEC1 R16 R17 R18 R19 R20 R21 R22 R23 R24 R25 SW2 U2 U3
component class Interface: C17 C18 C19 C20 C21 C22 J2 J3 J4 J5 J6 J7 J8 J9 J10 J14 J15 L1 MH1 MH2 MH3 MH4 R33 R34 U6
component class "BQ51003YFPT WirelessCharger": C23 C24 C25 C26 C27 C28 C29 C30 C31 C32 C33 C34 C35 C36 Q5 R35 R36 R37 R38 R39 U7 V8 V9 V10
component class BMA400: C37 C38 U8
differential pair USB: +USB_P -USB_N
differential pair USB_L: +USB_L_P -USB_L_N
differential pair USB_D: +USB_D_P -USB_D_N

## Components (designator, comment, footprint, x,y, rotation, side; value= is the part's Value field where it differs from the comment)
BT1 "6.8MM_COIN_CELL" MS421R_IV03E 3.302,26.035 r0 bottom
C1 "GRM155R61E105KE11D" CAPC1005X55N 10.541,0.762 r180 bottom value=1uF
C2 "GCM188R71C105KA64D" CAPC1608X90N 45.974,13.716 r90 top value=1uF (schematic designator C3)
C3 "100NF 0201 35V 10% X5R" CAP0201L 60.706,24.854 r0 bottom value=100nF (schematic designator C4)
C4 "100NF 0201 35V 10% X5R" CAP0201L 62.204,25.019 r180 bottom value=100nF (schematic designator C5)
C5 "470NF 0402 6.3V +50%/-20%" YFF15PC 65.786,29.345 r270 bottom value=470nF (schematic designator C6)
C6 "100NF 0201 35V 10% X5R" CAP0201L 64.008,7.366 r0 top value=100nF (schematic designator C7)
C7 "470NF 0402 6.3V +50%/-20%" YFF15PC 62.103,18.923 r180 bottom value=470nF (schematic designator C8)
C8 "GRM155R71C104KA88D" 0402 37.373,15.113 r180 top value=100nF (schematic designator C9)
C9 "1uF" CAPC1005X55N 39.624,11.74 r90 top (schematic designator C10)
C10 "GRM155R71C104KA88D" 0402 34.925,13.165 r90 top value=100nF (schematic designator C11)
C11 "1uF" CAPC1005X55N 36.878,10.287 r0 top (schematic designator C12)
C12 "1uF" CAPC1005X55N 36.245,23.191 r0 top (schematic designator C13)
C13 "GRM155R71C104KA88D" 0402 36.74,24.207 r180 top value=100nF (schematic designator C14)
C14 "GRM1555CYA103GE01D" GRM15x 41.829,26.703 r90 top value=0.01uF (schematic designator C15)
C15 "GRM1555CYA103GE01D" GRM15x 39.129,27.633 r180 top value=0.01uF (schematic designator C16)
C16 "GRM1555CYA103GE01D" GRM15x 36.967,28.038 r90 top value=0.01uF (schematic designator C18)
C17 "1uF" CAPC0603X35N 61.595,17.145 r90 top (schematic designator C19)
C18 "100nF" CAPC0603X33N 54.072,17.179 r90 top value=0.1uF (schematic designator C20)
C19 "GRM31CR61A107MEA8L" CAPC3216X180N 44.958,6.985 r270 top value=100uF (schematic designator C21)
C20 "GRM155R61A106ME11D" CAPC1005X55N 46.99,6.477 r90 top value=10uF (schematic designator C22)
C21 "GRM155R61E105KE11D" CAPC1005X55N 48.133,6.477 r90 top value=1uF (schematic designator C23)
C22 "GRM155R71C104KA88D" 0402 48.223,4.826 r180 top value=100nF (schematic designator C24)
C23 "GRM188R71E474KA12D" GRM18x 56.063,8.168 r180 top value=0.47uF (schematic designator C1)
C24 "GRM155R71H683ME14D" CAPC1005X70N 56.515,5.286 r90 top value=0.068uF (schematic designator C8)
C25 "GRM155R71E223KA61D" GRM15x 54.737,13.862 r0 top value=0.022uF (schematic designator C2)
C26 "EMK107BBJ106MA-T" CAPC1709X100N 53.702,11.732 r270 top (schematic designator C17)
C27 "GRM155R71C104KA88D" 0402 54.972,12.481 r270 top value=100nF (schematic designator C16)
C28 "GRM188R71H103KA01D" CAPC1608X90N 57.658,5.08 r90 top value=0.01uF (schematic designator C6)
C29 "GRM155R71E103KA01D" CAPC1005X70N 56.258,9.338 r180 top value=0.01uF (schematic designator C3)
C30 "EMK107BBJ106MA-T" CAPC1709X100N 63.227,11.636 r90 top (schematic designator C14)
C31 "GRM188R61C475KE11J" CAPC1608X90N 61.83,11.586 r90 top value=4.7uF (schematic designator C15)
C32 "GRM155R71H681KA01D" CAPC1005X70N 58.201,6.987 r180 top value=680pF (schematic designator C4)
C33 "GRM155R71H271KA01J" CAPC1005X70N 59.436,5.795 r180 top value=270pF (schematic designator C5)
C34 "GRM155R71E103KA01D" CAPC1005X70N 60.159,9.338 r0 top value=0.01uF (schematic designator C13)
C35 "GRM155R71E223KA61D" GRM15x 61.615,13.862 r180 top value=0.022uF (schematic designator C12)
C36 "GRM188R71E474KA12D" GRM18x 60.354,8.168 r0 top value=0.47uF (schematic designator C11)
C37 "100nF" CAPC0603X33N 35.941,20.409 r270 top value=0.1uF (schematic designator C1)
C38 "100nF" CAPC0603X33N 34.537,17.252 r90 top value=0.1uF (schematic designator C2)
C39 "100nF" CAPC0603X33N 19.248,27.94 r0 top value=0.1uF (schematic designator C1)
C40 "100nF" CAPC0603X33N 7.874,18.034 r90 top value=0.1uF (schematic designator C2)
C41 "GRM188R61A106MAALJ" CAPC1608X90N 50.53,21.153 r0 top value=10uF (schematic designator C1)
C42 "GRM188R61A226ME15D" GRM18x 49.828,25.82 r90 top value=22uF (schematic designator C2)
C43 "1uF" CAPC1005X55N 44.014,15.692 r270 bottom (schematic designator C28)
C44 "GRM155R71C104KA88D" 0402 41.691,11.923 r180 bottom value=100nF (schematic designator C29)
C45 "GRM155R71C104KA88D" 0402 39.188,14.267 r270 bottom value=100nF (schematic designator C30)
C46 "1uF" CAPC1005X55N 41.196,17.13 r0 bottom (schematic designator C31)
C47 "NC" CAPC1005X55N 8.509,14.224 r270 bottom (schematic designator C25)
C49 "NC" CAPC1005X55N 4.735,13.33 r90 bottom locked (schematic designator C27)
C50 "DNM" 7343-31 51.943,9.271 r90 bottom value=150uF (schematic designator C1)
C51 "GRM188Z71A475ME15D" CAPC1608X90N 37.592,3.598 r180 top value=4.7uF (schematic designator C2)
C52 "GRM155R61A225ME95D" CAPC1005X70N 37.846,2.455 r0 top value=2.2uF (schematic designator C3)
C53 "GRM155R61A225ME95D" CAPC1005X70N 35.306,7.027 r270 top value=2.2uF (schematic designator C4)
C54 "GRM155R61A106ME11D" CAPC1005X55N 36.195,5.122 r90 top value=10uF (schematic designator C5)
C55 "GRM155R61A106ME11D" CAPC1005X55N 35.306,5.122 r90 top value=10uF (schematic designator C6)
C56 "GRM155R61H105ME05J" GRM15x 54.102,1.016 r0 bottom value=1uF (schematic designator C2)
C57 "GRM1555CYA103GE01D" GRM15x 36.626,26.203 r90 top value=0.01uF (schematic designator C17)
C58 "GRM155R61H105ME05J" GRM15x 45.974,11.557 r90 top value=1uF (schematic designator C32)
D1 "RB751S40" SODFL1608X65N 22.352,1.713 r0 top
D2 "APHF1608LSEEQBDZGKC" "LED RGB 0603" 40.64,20.092 r270 top
D3 "APHF1608LSEEQBDZGKC" "LED RGB 0603" 42.672,20.092 r270 top
D4 "PMEG4005EJ" SOD2512X80N 2.413,22.225 r180 bottom (schematic designator D1)
J1 "TC2030-NL" TC2030NL 67.945,30.861 r270 bottom (schematic designator J2)
J2 "860-10-002-10-001101" 8601000210001101 48.911,33.02 r0 top (schematic designator J1)
J3 "860-10-003-10-001101" 8601000310001101 27.416,1.905 r180 top (schematic designator J4)
J4 "USB4215-03-A_REVA" GCT_USB4215-03-A_REVA 67.818,19.941 r90 top (schematic designator J5)
J5 "S2B-PH-K-S" S2BPHKS 47.53,2.54 r180 top (schematic designator J8)
J6 "DF52-12S-0.8H_21_" DF5212S08H21 33.954,32.968 r180 top (schematic designator J9)
J7 "M20-9990245" "HDR 2POS 2.54MM THRU HOLE" 59.69,2.667 r0 top (schematic designator J10)
J8 "BM04B-GHS-TBT_LF__SN__N_" BM04BGHSTBTLFSNN 66.929,10.541 r270 bottom (schematic designator J11)
J9 "PRT-14417" SPARKFUN_PRT-14417 67.437,19.939 r270 bottom (schematic designator J12)
J10 "M20-9990245" "HDR 2POS 2.54MM THRU HOLE" 45.212,32.893 r180 top locked (schematic designator J13)
J11 "U.FL-R-SMT-1_10_" U.FL-R-SMT-1(10) 1.56,13.79 r90 bottom locked (schematic designator J14)
J12 "TC2030-NL" TC2030NL 12.827,32.385 r180 bottom (schematic designator J15)
J13 "SMA_T_9.52_NF" CO_SAMTEC_SMA-J-P-ST-EMI 0.036,13.764 r90 bottom locked (schematic designator J17)
J14 "860-10-003-10-001101" 8601000310001101 24.876,32.893 r180 bottom (schematic designator J7)
J15 "M20-9990245" "HDR 2POS 2.54MM THRU HOLE" 52.578,2.54 r0 top (schematic designator J6)
L1 "744232090" WE-CNSW-SMD 60.071,23.495 r90 top
L2 "DFE252012F-2R2M=P2" DFE2HCAH1R0MJ0L 53.511,23.534 r90 top value=2.2uH (schematic designator L1)
L3 "RCC06030000Z0EA" RCC0603_e3 6.604,13.716 r180 bottom (schematic designator L2)
L3 "Replace by 0R 0603" LQW18AN10NG80D 6.604,13.716 r0 bottom value=18nH (schematic designator L2)
L4 "RCC06030000Z0EA" RCC0603_e3 11.684,13.716 r0 bottom (schematic designator L3)
L5 "XEL4020-102MEB" XEL4020 41.021,4.318 r90 top value=1uH (schematic designator L1)
MEC1 "VLP-400-F" VLP-400-F 41.783,20.066 r90 top
MH1 "Mounting Hole M2" "MOUNTING HOLE M2 UNPLATED" 66.675,32.385 r0 top
MH2 "Mounting Hole M2 Plated" "Mounting Hole M2 Plated" 3.302,3.302 r0 top
MH3 "Mounting Hole M2 Plated" "Mounting Hole M2 Plated" 3.302,31.75 r0 top
MH4 "Mounting Hole M2 Plated" "Mounting Hole M2 Plated" 66.675,3.302 r0 top
O1 "NO" SMT-JUMPER_2_NO_TRACE_SILK 40.64,20.574 r270 bottom
O2 "NO" SMT-JUMPER_2_NO_TRACE_SILK 32.639,1.778 r270 bottom
O3 "NO" SMT-JUMPER_2_NO_TRACE_SILK 28.599,1.778 r270 bottom
O4 "NO" SMT-JUMPER_2_NO_TRACE_SILK 30.607,1.778 r270 bottom
O5 "NO" SMT-JUMPER_2_NO_TRACE_SILK 54.991,8.763 r270 bottom
O6 "NO, Option for digital SWS" SMT-JUMPER_2_NO_TRACE_SILK 44.831,30.099 r0 top
O7 "NC" SMT-JUMPER_2_NC_TRACE_SILK 57.023,6.096 r270 bottom
O8 "NC" SMT-JUMPER_2_NC_TRACE_SILK 42.291,30.099 r180 top
O9 "NC" SMT-JUMPER_2_NC_TRACE_SILK 45.199,23.749 r180 top
O10 "NC-Left, Option to connect nRST" SMT-JUMPER_3_2-NCLEFT_TRACE_SILK 51.181,20.066 r0 bottom
O11 "NO" SMT-JUMPER_2_NO_TRACE_SILK 51.816,22.995 r90 bottom
O12 "NC-Left, Option to complete shutdown" SMT-JUMPER_3_2-NCLEFT_TRACE_SILK 38.481,1.524 r0 bottom
O13 "NC-Left, Option to VBAT by VSYS or main SAT VDD" SMT-JUMPER_3_2-NCLEFT_TRACE_SILK 41.656,9.637 r90 bottom (schematic designator O19)
O14 "NO, Help to flash" SMT-JUMPER_2_NO_TRACE_SILK 45.085,1.524 r180 bottom (schematic designator O13)
O15 "NC-Left, Option to connect nRST" SMT-JUMPER_3_2-NCLEFT_TRACE_SILK 32.385,10.795 r0 top (schematic designator O18)
Q1 "MMBT3904LT1G" SOT96P237X111-3N 60.198,16.129 r180 bottom
Q2 "DMP2305U-7" SOT96P240X115-3N 60.198,10.922 r270 bottom
Q3 "IRLML6401TRPBF" SOT95P237X112-3N 18.576,1.713 r0 top
Q4 "IRLML6401TRPBF" SOT95P237X112-3N 14.224,1.713 r0 top
Q5 "CSD75208W1015" BGA6C50P2X3_95X145X62 57.785,18.161 r270 top (schematic designator Q1)
R1 "4.7K 0201 1% 100PPM" RES0201L 50.971,28.233 r180 top value=4.7K
R2 "4.7K 0201 1% 100PPM" RES0201L 50.945,29.122 r180 top value=4.7K
R3 "1kR" RESC0603X28N 63.649,17.011 r0 bottom value=1KR
R4 "CRCW040210K0JNEDC" RESC1005X40N 60.452,13.589 r180 bottom value=10kR
R5 "RT0805BRD071M33L" RESC2012X60N 60.325,8.001 r180 bottom value=1.33MR
R6 "RGV3216P-3004-B-T1" RESC3216X55N 57.023,10.287 r90 bottom value=3MR
R7 "10M 0402 1%" RES0402L 15.367,1.27 r270 bottom value=10M
R8 "10M 0402 1%" RES0402L 47.775,20.613 r0 top value=10M
R9 "RC0201FR-7D1ML" RESC0603X26N 47.865,22.819 r0 top value=1MR
R10 "ERJ-U02F1002X" ERJS02_U02_(0402) 49.149,10.033 r90 top value=10kR
R11 "CRCW0201383RFNED" RESC0603X28N 48.01,10.033 r90 top value=383R
R12 "CRCW020127K4FNED" RESC0603X28N 48.006,15.875 r270 top value=27.4kR
R13 "RC0402JR-7D1KL" RESC1005X40N 38.354,21.59 r90 top value=1kR
R14 "RC0402JR-7D330RL" RESC1005X40N 37.846,19.457 r0 top value=330R
R15 "CRCW04021K60JNED" RESC1005X40N 41.09,15.944 r270 top value=1.6kR
R16 "10K 0201 1% 100PPM" RES0201L 64.008,8.255 r180 top value=10K
R17 "0R 0201" RES0201N 62.58,29.879 r0 top value=0R
R18 "RC0201FR-0710ML" RESC0603X26N 53.213,27.051 r0 bottom value=10MR
R19 "RC0201FR-0710ML" RESC0603X26N 58.293,24.892 r0 bottom value=10MR
R20 "RC0201FR-0710ML" RESC0603X26N 40.005,7.535 r180 top value=10MR
R21 "RC0201FR-0710ML" RESC0603X26N 53.213,28.321 r0 bottom value=10MR
R22 "RC0201FR-0710ML" RESC0603X26N 53.213,29.972 r0 bottom value=10MR
R23 "750R 0201 1% 100PPM" RES0201L 45.212,21.183 r90 top value=750R
R24 "330R 0201 1% 100PPM" RES0201L 42.291,16.409 r90 top value=330R
R25 "1.6K 0201 1% 100PPM" RES0201L 43.053,16.409 r90 top value=1.6K
R26 "Resistor" R0402 17.018,6.223 r90 top value=NF
R27 "1kR" RESC0603X28N 42.718,26.64 r270 top value=1KR
R28 "RC0201FR-7D1ML" RESC0603X26N 41.402,24.384 r90 top value=1MR
R29 "RES NF 0402" RES0402N_NF 37.846,17.653 r0 top value=NF
R30 "1kR" RESC0603X28N 40.016,28.522 r180 top value=1KR
R31 "0R 0402" RES0402N 37.846,16.51 r180 top value=0R
R32 "1kR" RESC0603X28N 35.987,27.975 r270 top value=1KR (schematic designator R33)
R33 "CRCW02015K10JNED" RESC0603X28N 61.849,24.13 r270 top value=5.1kR (schematic designator R35)
R34 "CRCW02015K10JNED" RESC0603X28N 60.401,16.764 r90 top value=5.1kR (schematic designator R36)
R35 "DNP" RESC1005X40N 55.061,16.976 r270 top value=0R (schematic designator R5)
R36 "CRCW020120K0FKED" RESC0603X28N 58.109,15.494 r0 top value=20kR (schematic designator R2)
R37 "RC0201FR-7D10KL" RESC0603X26N 60.741,15.132 r0 top value=10KR (schematic designator R4)
R38 "ERJ-1GNF2550C" RESC0603X28N 58.937,16.44 r0 top value=255R (schematic designator R1)
R39 "CRCW0201196RFKED" RESC0603X28N 56.642,15.621 r270 top value=196R (schematic designator R3)
R40 "ERJ-U02F4700X" ERJS02_U02_(0402) 29.713,20.32 r0 top value=470R (schematic designator R1)
R41 "CRCW04023K30FKED" RESC1005X40N 5.969,22.225 r180 bottom value=3.3KR (schematic designator R2)
R42 "ERJ-U02F4700X" ERJS02_U02_(0402) 29.713,18.415 r0 top value=470R (schematic designator R3)
R43 "ERJ-U02F22R0X" ERJS02_U02_(0402) 29.713,16.515 r0 top value=22R (schematic designator R4)
R44 "ERJ-U02F22R0X" ERJS02_U02_(0402) 18.918,6.223 r90 top value=22R (schematic designator R5)
R45 "CRCW020136K5FNED" RESC0603X28N 47.7,21.962 r180 top value=36.5KR (schematic designator R1)
R46 "RC0201FR-070RL" RESC0603X26N 47.865,23.665 r180 top value=0R (schematic designator R2)
R47 "CRCW02012K74FNED" RESC0603X28N 47.7,24.502 r0 top value=2.74kR (schematic designator R3)
R48 "CRCW0201100KJNED" RESC0603X28N 50.165,23.104 r270 bottom value=100kR (schematic designator R34)
R49 "RC0201FR-070RL" RESC0603X26N 32.426,8.255 r180 top value=0R (schematic designator R37)
R50 "CRCW040249K9FKED" RESC1005X40N 37.846,7.535 r0 top value=49.9kR (schematic designator R1)
R51 "1kR" RESC0603X28N 35.864,26.14 r270 top value=1KR (schematic designator R32)
R52 "CRCW04020000Z0EEHP" RESC1005X40N 51.816,17.526 r0 top value=0R (schematic designator R38)
R53 "CRCW04020000Z0EEHP" RESC1005X40N 47.752,17.526 r0 top value=0R (schematic designator R39)
R54 "CRCW04020000Z0EEHP" RESC1005X40N 51.308,11.176 r180 top value=0R (schematic designator R40)
R55 "CRCW04020000Z0EEHP" RESC1005X40N 49.784,18.161 r90 top value=0R (schematic designator R41)
R56 "CRCW04020000Z0EEHP" RESC1005X40N 51.308,12.446 r180 top value=0R (schematic designator R42)
SW1 "CT8132BV-IS3" SOT95P280X140-3N 9.144,1.778 r180 top
SW2 "PTS820J2x" TL1015 67.056,9.525 r270 top
U1 "BQ25176MDSGR" SON50P200X200X80-9N 48.26,12.827 r90 top
U2 "ISP1807-LR" ISP1807-LR 60.96,30.099 r0 bottom
U3 "IS25LP128F-JKLE" SON127P600X80_HS-9N 57.404,20.828 r0 bottom
U4 "TPS22960RSER" TPS22960RSER 37.338,12.7 r180 top
U5 "ADS1115IRUGR" ADS1115IRUGR 39.159,25.478 r90 top
U6 "USBLC62P6" USBLC62P6 60.198,27.051 r0 top (schematic designator U7)
U7 "BQ51003YFPT" BGA28C40P4X7_188X301X50 58.201,12.592 r180 top (schematic designator U1)
U8 "BMA400" LGA12-BMA400 34.29,19.304 r0 top (schematic designator U1)
U9 "SAM-M10Q-00B" SAMM10Q00B 17.018,18.415 r0 top (schematic designator U1)
U10 "TPS63901YCJR" BGA12C35P3X4_111X146X35 49.828,23.232 r180 top (schematic designator U1)
U11 "KIM2" "KIM2 FOOTPRINT" 28.599,17.166 r180 bottom (schematic designator U6)
U12 "TPS22960RSER" TPS22960RSER 41.656,14.732 r180 bottom (schematic designator U8)
U13 "stm32wl-SMD" stm32wl-SMD_noLegs 36.014,7.747 r180 bottom (schematic designator U9)
U14 "TPS612997YBHR" BGA6C40P2X3_84X123X40 37.592,5.503 r180 top (schematic designator U1)
V4 "Via_0.3/0.6" Via_0.3/0.6 36.576,8.509 r180 top net-tie (schematic designator V7)
V5 "Via_0.3/0.6" Via_0.3/0.6 36.83,8.89 r180 top net-tie (schematic designator V8)
V6 "Via_0.3/0.6" Via_0.3/0.6 37.084,8.509 r180 top net-tie (schematic designator V9)
V7 "Via_0.3/0.6" Via_0.3/0.6 57.15,2.54 r0 top net-tie (schematic designator V10)
V8 "Via_0.3/0.6" Via_0.3/0.6 58.573,10.671 r0 top net-tie (schematic designator V1)
V9 "Via_0.3/0.6" Via_0.3/0.6 58.192,10.036 r0 top net-tie (schematic designator V2)
V10 "Via_0.3/0.6" Via_0.3/0.6 57.811,10.671 r90 top net-tie (schematic designator V3)
V?1 "Via_0.3/0.6" Via_0.3/0.6 38.114,28.666 r180 top net-tie (schematic designator V4)
V?2 "Via_0.3/0.6" Via_0.3/0.6 38.654,28.649 r180 top net-tie (schematic designator V5)
V?3 "Via_0.3/0.6" Via_0.3/0.6 38.377,29.053 r180 top net-tie (schematic designator V6)

## Footprints (in the part's own frame and the unit in brackets; to place one, negate y for a bottom-side part, rotate by r counter-clockwise, add the part's x,y. Pads: shape width x height; smd on the part's side, far side on the other; paste and mask are expansions set on the pad)
0402 [mm]
  rect 0.7x0.7 smd: 1(0.035,0) 2(1.233,0)
  silkscreen extent -0.41,-0.45 1.67,0.45, body extent -0.38,-0.36 1.65,0.36, height 0.82
7343-31 [mm]
  rect 2.55x2.45 smd: 1(-3.025,0) 2(3.025,0)
  silkscreen extent -4.56,-2.3 3.8,2.3, body extent -3.8,-2.3 3.8,2.3, height 3.1
8601000210001101 [mm]
  rect 0.85x0.85 hole 0.6: 1(0,0)
  round 0.85 hole 0.6: 2(1,0)
  silkscreen extent -1.6,-1 2,1, body extent -1,-1 2,1, height 3.73
8601000310001101 [mm]
  round 0.8 hole 0.6: 1(0,0) 2(1,0) 3(2,0)
  silkscreen extent -1.4,-1.1 3,1.1, body extent -1,-1.1 3,1.1, height 3.73
ADS1115IRUGR [mm]
  rect 0.3x0.575 smd: 1(-0.75,-0.638) 4(0.75,-0.638) 6(0.75,0.638) 9(-0.75,0.638)
  rect 0.25x0.575 smd: 2(-0.25,-0.638) 3(0.25,-0.638) 7(0.25,0.638) 8(-0.25,0.638)
  rect 0.63x0.35 smd: 5(0.86,0) 10(-0.86,0)
  silkscreen extent -1,-1.25 -0.9,-1.15, body extent -1,-0.75 1,0.75, height 0.4
BGA6C40P2X3_84X123X40 [mm]
  round 0.204 smd: A1(-0.2,0.4) A2(0.2,0.4) B1(-0.2,0) B2(0.2,0) C1(-0.2,-0.4) C2(0.2,-0.4)
  silkscreen extent -0.75,-0.85 0.65,0.95, body extent -0.42,-0.61 0.42,0.61, height 0.4
BGA6C50P2X3_95X145X62 [mm]
  round 0.298 smd: A1(-0.25,0.5) A2(0.25,0.5) B1(-0.25,0) B2(0.25,0) C1(-0.25,-0.5) C2(0.25,-0.5)
  silkscreen extent -0.85,-1 0.75,1.1, body extent -0.48,-0.72 0.48,0.72, height 0.63
BGA12C35P3X4_111X146X35 [mm]
  round 0.169 smd: A1(-0.35,0.525) A2(0,0.525) A3(0.35,0.525) B1(-0.35,0.175) B2(0,0.175) B3(0.35,0.175) C1(-0.35,-0.175) C2(0,-0.175) C3(0.35,-0.175) D1(-0.35,-0.525) D2(0,-0.525) D3(0.35,-0.525)
  silkscreen extent -0.88,-0.96 0.78,1.06, body extent -0.56,-0.73 0.56,0.73, height 0.35
BGA28C40P4X7_188X301X50 [mm]
  round 0.226 smd: A1(-0.6,1.2) A2(-0.2,1.2) A3(0.2,1.2) A4(0.6,1.2) B1(-0.6,0.8) B2(-0.2,0.8) B3(0.2,0.8) B4(0.6,0.8) C1(-0.6,0.4) C2(-0.2,0.4) C3(0.2,0.4) C4(0.6,0.4) D1(-0.6,0) D2(-0.2,0) D3(0.2,0) D4(0.6,0) E1(-0.6,-0.4) E2(-0.2,-0.4) E3(0.2,-0.4) E4(0.6,-0.4) F1(-0.6,-0.8) F2(-0.2,-0.8) F3(0.2,-0.8) F4(0.6,-0.8) G1(-0.6,-1.2) G2(-0.2,-1.2) G3(0.2,-1.2) G4(0.6,-1.2)
  silkscreen extent -1.16,-1.66 1.06,1.76, body extent -0.94,-1.5 0.94,1.5, height 0.5
BM04BGHSTBTLFSNN [mm]
  rect 0.6x1.7 smd: 1(1.875,1.95) 2(0.625,1.95) 3(-0.625,1.95) 4(-1.875,1.95)
  rect 1x2.8 smd: MP1(3.225,-1.4) MP2(-3.225,-1.4)
  silkscreen extent -4.13,-2.5 4.13,2.4, body extent -4.13,-2.7 4.13,2.74, height 4.15
CAP0201L [mm]
  rect 0.36x0.32 smd: 1(-0.28,0) 2(0.28,0)
  silkscreen extent -0.4,-0.3 0.4,0.3, body extent -0.31,-0.16 0.31,0.16, height 0.3
CAPC0603X33N [mm]
  rect 0.46x0.42 smd: 1(-0.33,0) 2(0.33,0)
  body extent -0.3,-0.15 0.3,0.15, height 0.33
CAPC0603X35N [mm]
  rect 0.46x0.42 smd: 1(-0.33,0) 2(0.33,0)
  body extent -0.3,-0.15 0.3,0.15, height 0.35
CAPC1005X55N [mm]
  rect 0.6x0.62 smd: 1(-0.46,0) 2(0.46,0)
  body extent -0.5,-0.25 0.5,0.25, height 0.55
CAPC1005X70N [mm]
  rect 0.69x0.72 smd: 1(-0.46,0) 2(0.46,0)
  body extent -0.5,-0.25 0.5,0.25, height 0.7
CAPC1608X90N [mm]
  rect 0.75x0.94 smd: 1(-0.7,0) 2(0.7,0)
  body extent -0.8,-0.45 0.8,0.45, height 0.8
CAPC1709X100N [mm]
  rect 0.81x1.04 smd: 1(-0.72,0) 2(0.72,0)
  body extent -0.85,-0.45 0.85,0.45, height 1
CAPC3216X180N [mm]
  rect 1.07x1.82 smd: 1(-1.38,0) 2(1.38,0)
  silkscreen extent 0,-0.7 0,0.7, body extent -1.6,-0.8 1.6,0.8, height 1.8
CO_SAMTEC_SMA-J-P-ST-EMI [mm] "SMA Jack CMS, Edge Mountt Receptacle 50Ohm, 5-Leads, Body 6.35x6.35x9.52mm, pitch 2.825mm"
  rect 1.27x3.6 smd mask+0.05: 1(0,1.9)
  rect 1.35x4.2 smd far side mask+0.05: 2(-2.825,2.1) 2(2.825,2.1)
  rect 1.35x4.2 smd mask+0.05: 2(-2.825,2.1) 2(2.825,2.1)
  silkscreen extent -3.75,0.5 3.75,4.45, body extent -3.17,-10.13 3.18,3.2, height 3.8
DF5212S08H21 [mm]
  rect 0.5x1 smd: 1(-4.4,1.345) 2(-3.6,1.345) 3(-2.8,1.345) 4(-2,1.345) 5(-1.2,1.345) 6(-0.4,1.345) 7(0.4,1.345) 8(1.2,1.345) 9(2,1.345) 10(2.8,1.345) 11(3.6,1.345) 12(4.4,1.345)
  rect 0.9x1.6 smd: 13(-5.65,-0.575) 14(5.65,-0.575)
  silkscreen extent -5.9,-1.38 5.9,1.38, body extent -5.9,-1.16 5.9,1.61, height 1.75
DFE2HCAH1R0MJ0L [mm]
  rect 0.85x2.2 smd: 1(-1.025,0) 2(1.025,0)
  silkscreen extent 0,-1 0,1, body extent -1.25,-1 1.25,1, height 1.2
ERJS02_U02_(0402) [mm]
  rect 0.475x0.5 smd: 1(-0.513,0) 2(0.513,0)
  silkscreen extent -1.16,-0.05 -1.06,0.05, body extent -0.5,-0.25 0.5,0.25, height 0.35
GCT_USB4215-03-A_REVA [mm]
  rect 0.6x1.15 smd: A1_B12(-3.2,4.575) A4_B9(-2.4,4.575) B1_A12(3.2,4.575) B4_A9(2.4,4.575)
  rect 0.3x1.15 smd: A5(-1.25,4.575) A6(-0.25,4.575) A7(0.25,4.575) A8(1.25,4.575) B5(1.75,4.575) B6(0.75,4.575) B7(-0.75,4.575) B8(-1.75,4.575)
  oval 1x2.2 hole 0.6 slot 1.8 at 90 deg: SHIELD(-4.32,0) SHIELD(4.32,0)
  oval 1x1.8 hole 0.6 slot 1.4 at 90 deg: SHIELD(-4.32,4) SHIELD(4.32,4)
  silkscreen extent -4.47,-2.1 4.47,5.8, body extent -4.47,-2.03 4.47,4.72, height 3.28
GRM15x [mm]
  rect 0.45x0.6 smd: 1(-0.475,0) 2(0.475,0)
  silkscreen extent -1.05,-0.05 -0.95,0.05, body extent -0.5,-0.28 0.5,0.27, height 0.5
GRM18x [mm]
  rect 0.65x0.7 smd: 1(-0.675,0) 2(0.675,0)
  silkscreen extent 0,-0.4 0,0.4, body extent -0.8,-0.45 0.8,0.45, height 0.8
"HDR 2POS 2.54MM THRU HOLE" [mm]
  rect 1.9x1.9 hole 1: 1(0,0)
  round 1.9 hole 1: 2(2.54,0)
  silkscreen extent -1.25,-1.27 3.83,1.27, body extent -1.25,-1.27 3.83,1.27, height 8.65
ISP1807-LR [mm]
  rect 0.8x0.8 smd mask+0.05: 1(-3.5,3.5) 7(-3.5,0.4) 25(3.5,0.4) 31(3.5,3.5) 68(-3.5,-3.5) 75(3.5,-3.5)
  rect 0.4x0.4 smd mask+0.05: 2(-3.7,2.6) 3(-3.05,2.275) 4(-3.7,1.95) 5(-3.05,1.625) 6(-3.7,1.3) 8(-2.6,0.2) 9(-2.275,0.85) 10(-1.95,0.2) 11(-1.625,0.85) 12(-1.3,0.2) 13(-0.975,0.85) 14(-0.65,0.2) 15(-0.325,0.85) 16(0,0.2) 17(0.325,0.85) 18(0.65,0.2) 19(0.975,0.85) 20(1.3,0.2) 21(1.625,0.85) 22(1.95,0.2) 23(2.275,0.85) 24(2.6,0.2) 26(3.7,1.3) 27(3.05,1.625) 28(3.7,1.95) 29(3.05,2.275) 30(3.7,2.6) 32(2.6,3.7) 33(2.275,3.05) 34(1.95,3.7) 35(1.625,3.05) 36(1.3,3.7) 37(0.975,3.05) 38(0.65,3.7) 39(0.325,3.05) 40(0,3.7) 41(-0.325,3.05) 42(-0.65,3.7) 43(-0.975,3.05) 44(-1.3,3.7) 45(-1.625,3.05) 46(-1.95,3.7) 47(-2.275,3.05) 48(-2.6,3.7) 49(2.275,2.275) 50(1.625,2.275) 51(0.975,2.275) 52(0.325,2.275) 53(-0.325,2.275) 54(-0.975,2.275) 55(-1.625,2.275) 56(-2.275,2.275) 57(2.275,1.625) 58(1.625,1.625) 59(0.975,1.625) 60(0.325,1.625) 61(-0.325,1.625) 62(-0.975,1.625) 63(-1.625,1.625) 64(-2.275,1.625) 65(-3.7,-0.55) 66(-3.7,-1.55) 67(-3.7,-2.55) 69(-2.5,-3.7) 70(-1.5,-3.7) 71(-0.5,-3.7) 72(0.5,-3.7) 73(1.5,-3.7) 74(2.5,-3.7) 76(3.7,-2.55) 77(3.7,-1.55) 78(3.7,-0.55)
  silkscreen extent -4.1,-4.1 4.1,4.1, body extent -4,-4 4,4.01, height 1.2
"KIM2 FOOTPRINT" [mm] "KIM2-FLEX Module 36.6x25.4x5mm"
  rect 2.2x1 smd mask+0.075: 1(-18.15,7.62)
  round 0.5 on Mech9 paste+0 mask+0.1: 1(-17.55,7.62) 2(-17.55,6.35) 4(-17.55,3.81) 6(-17.55,-2.54) 7(-17.55,-3.81) 9(-17.55,-6.35) 37(5.08,11.95) 40(1.27,11.95) 42(-1.27,11.95) 43(-2.54,11.95) 45(-10.16,11.95) 47(-12.7,11.95) 48(-13.97,11.95)
  rrect50% 2.2x1 smd mask+0.075: 2(-18.15,6.35) 3(-18.15,5.08) 4(-18.15,3.81) 5(-18.15,2.54) 6(-18.15,-2.54) 6(-18.15,-2.54) 7(-18.15,-3.81) 7(-18.15,-3.81) 8(-18.15,-5.08) 8(-18.15,-5.08) 9(-18.15,-6.35) 9(-18.15,-6.35) 10(-18.15,-7.62) 10(-18.15,-7.62) 26(18.15,-9.8) 27(18.15,-8.53) 28(18.15,-7.26) 29(18.15,-5.99) 30(18.15,-4.72) 31(18.15,-3.45) 32(18.15,-2.18) 33(18.15,-0.91)
  round 0.5 on Mech9 paste-127 mask+0: 3(-17.55,5.08) 5(-17.55,2.54) 8(-17.55,-5.08) 10(-17.55,-7.62) 11(-13.97,-11.95) 12(-12.7,-11.95) 13(-11.43,-11.95) 14(-10.16,-11.95) 15(-8.89,-11.95) 16(-2.54,-11.95) 17(-1.27,-11.95) 18(0,-11.95) 19(1.27,-11.95) 20(2.54,-11.95) 21(3.81,-11.95) 22(5.08,-11.95) 23(6.35,-11.95) 24(13.97,-11.95) 25(15.24,-11.95) 26(17.55,-9.8) 27(17.55,-8.53) 28(17.55,-7.26) 29(17.55,-5.99) 30(17.55,-4.72) 31(17.55,-3.45) 32(17.55,-2.18) 33(17.55,-0.91) 34(15.24,11.95) 35(13.97,11.95) 36(6.35,11.95) 38(3.81,11.95) 39(2.54,11.95) 41(0,11.95) 44(-8.89,11.95) 46(-11.43,11.95)
  rrect50% 1x2.2 smd mask+0.075: 11(-13.97,-12.55) 12(-12.7,-12.55) 13(-11.43,-12.55) 14(-10.16,-12.55) 15(-8.89,-12.55) 16(-2.54,-12.55) 17(-1.27,-12.55) 18(0,-12.55) 19(1.27,-12.55) 20(2.54,-12.55) 21(3.81,-12.55) 22(5.08,-12.55) 23(6.35,-12.55) 24(13.97,-12.55) 25(15.24,-12.55) 34(15.24,12.55) 35(13.97,12.55) 36(6.35,12.55) 37(5.08,12.55) 38(3.81,12.55) 39(2.54,12.55) 40(1.27,12.55) 41(0,12.55) 42(-1.27,12.55) 43(-2.54,12.55) 44(-8.89,12.55) 45(-10.16,12.55) 46(-11.43,12.55) 47(-12.7,12.55) 48(-13.97,12.55)
  Top Layer pour cut-out: 16.8,11.2 16.8,-11.2 -16.8,-11.2 -16.8,11.2
  silkscreen extent -18.8,-13.2 18.8,13.2, body extent -18.32,-12.72 18.33,12.73, height 4.8
"LED RGB 0603" [mm]
  rect 0.5x0.4 smd: 1(-0.65,0.35) 2(-0.65,-0.35) 3(0.65,-0.35) 4(0.65,0.35)
  silkscreen extent -1.26,-0.7 1.05,0.7, body extent -0.8,-0.4 0.8,0.4, height 0.51
LGA12-BMA400 [mm]
  rect 0.3x0.35 smd: 1(-0.75,-0.775) 2(-0.25,-0.775) 3(0.25,-0.775) 4(0.75,-0.775) 7(0.75,0.775) 8(0.25,0.775) 9(-0.25,0.775) 10(-0.75,0.775)
  rect 0.35x0.3 smd: 5(0.775,-0.25) 6(0.775,0.25) 11(-0.775,0.25) 12(-0.775,-0.25)
  round 0.2 on Top Overlay: ""(-0.975,-1.225)
  Top Layer pour cut-out: -1.05,1.05 -1.05,-1.05 1.05,-1.05 1.05,1.05
  silkscreen extent -1.05,-1.05 1.05,1.05, body extent -1,-1 1,1, height 1
LQW18AN10NG80D [mm]
  rect 0.57x1.15 smd: 1(-0.715,0) 2(0.715,0)
  silkscreen extent 0,-0.3 0,0.3, body extent -0.82,-0.5 0.82,0.5, height 0.9
"Mounting Hole M2 Plated" [mm]
  round 5.5 hole 2.2: 1(0,0)
"MOUNTING HOLE M2 UNPLATED" [mm]
  round 2 hole 2 unplated mask+0: 0(0,0)
  silkscreen extent -1.5,-1.5 1.5,1.5
MS421R_IV03E [mm]
  rect 1x1 smd paste+0 mask+0: +(2.022,2.032)
  rect 4.2x1.7 smd paste+0 mask+0: -(0.6,-1.85)
  Top Layer region: 0.22,2.705 2.705,2.705 2.705,0.22
R0402 [mm]
  rect 0.51x0.7 smd mask+0.05: 1(-0.45,0) 2(0.45,0)
  silkscreen extent -0.73,-0.42 0.73,0.42, body extent -0.52,-0.3 0.52,0.3, height 0.4
RCC0603_e3 [mm]
  rect 0.75x1 smd: 1(-0.75,0) 2(0.75,0)
  silkscreen extent -1.65,-0.05 -1.55,0.05, body extent -0.77,-0.42 0.78,0.43, height 0.45
RES0201L [mm]
  rect 0.36x0.32 smd: 1(-0.28,0) 2(0.28,0)
  silkscreen extent -0.4,-0.3 0.4,0.3, body extent -0.31,-0.16 0.31,0.16, height 0.3
RES0201N [mm]
  rect 0.46x0.42 smd: 1(-0.33,0) 2(0.33,0)
  silkscreen extent -0.5,-0.38 0.5,0.37, body extent -0.31,-0.16 0.31,0.16, height 0.3
RES0402L [mm]
  rect 0.5x0.45 smd: 1(-0.4,0) 2(0.4,0)
  body extent -0.55,-0.27 0.55,0.28, height 0.35
RES0402N [mm]
  rect 0.62x0.62 smd: 1(-0.45,0) 2(0.45,0)
  silkscreen extent -0.95,-0.5 0.95,0.5, body extent -0.52,-0.27 0.53,0.28, height 0.4
RES0402N_NF [mm]
  rect 0.62x0.62 smd: 1(-0.45,0) 2(0.45,0)
  silkscreen extent -0.95,-0.5 0.95,0.5
RESC0603X26N [mm]
  rect 0.44x0.42 smd: 1(-0.34,0) 2(0.34,0)
  body extent -0.3,-0.15 0.3,0.15, height 0.26
RESC0603X28N [mm]
  rect 0.625x0.4 smd: 1(-0.412,0) 2(0.412,0)
  body extent -0.3,-0.15 0.3,0.15, height 0.28
RESC1005X40N [mm]
  rect 0.75x0.6 smd: 1(-0.55,0) 2(0.55,0)
  body extent -0.49,-0.25 0.51,0.25, height 0.35
RESC2012X60N [mm]
  rect 0.95x1.4 smd: 1(-0.95,0) 2(0.95,0)
  silkscreen extent 0,-0.53 0,0.53, body extent -1,-0.63 1,0.63, height 0.6
RESC3216X55N [mm]
  rect 1.15x1.85 smd: 1(-1.5,0) 2(1.5,0)
  silkscreen extent 0,-0.7 0,0.7, body extent -1.6,-0.8 1.6,0.8, height 0.55
S2BPHKS [mm]
  round 1.3 hole 0.8: 1(0,0) 2(-2,0)
  silkscreen extent -3.95,-2 1.95,6.25, body extent -3.95,-1.35 1.95,6.25, height 4.9
SAMM10Q00B [mm]
  rect 1.8x1.5 smd: 1(-6.6,3.8) 2(-6.6,1.9) 3(-6.6,0) 4(-6.6,-1.9) 5(-6.6,-3.8) 11(6.6,-3.8) 12(6.6,-1.9) 13(6.6,0) 14(6.6,1.9) 15(6.6,3.8)
  rect 1.5x1.8 smd: 6(-3.8,-6.6) 7(-1.9,-6.6) 8(0,-6.6) 9(1.9,-6.6) 10(3.8,-6.6) 16(3.8,6.6) 17(1.9,6.6) 18(0,6.6) 19(-1.9,6.6) 20(-3.8,6.6)
  silkscreen extent -8.35,-7.75 7.75,7.75, body extent -7.75,-7.75 7.75,7.75, height 6.3
SMT-JUMPER_2_NC_TRACE_SILK [mil] "SMT-JUMPER_2_NC_TRACE_SILK"
  rect 26x50 smd paste+0: 1(-20.5,0) 2(20.5,0)
  Top Layer region: -1.25,5.25 27.75,5.25 27.75,-5.25 -1.25,-5.25
  Top Layer region: -27.75,5.25 1.25,5.25 1.25,-5.25 -27.75,-5.25
SMT-JUMPER_2_NO_TRACE_SILK [mil] "SMT-JUMPER_2_NC_TRACE_SILK"
  rect 26x39.37 smd paste+0: 1(-20.5,0) 2(20.5,0)
SMT-JUMPER_3_2-NCLEFT_TRACE_SILK [mil] "SMT-JUMPER_3_2-NC_TRACE_SILK"
  rect 26x39.37 smd paste+0: 1(-41,0) 2(0,0) 3(41,0)
  Top Layer region: -21.25,5.25 10,5.25 10,-5.25 -21.25,-5.25
  Top Layer region: -48.75,5.25 -19.75,5.25 -19.75,-5.25 -48.75,-5.25